# Altium PCB MZCAT_motherboard.PcbDoc (part 1 of 4)
Units mm, origin at the board's own origin, x right, y up, seen from the top; angles counter-clockwise.
Board outline 99.01 x 133.6 mm, 6 copper layers (Top Layer, Ref Top, Layer 2, Layer 3, Ref Bot, Bottom Layer), stack 1.473 mm thick; 289 components, 231 nets, 1176 pads, 492 vias.
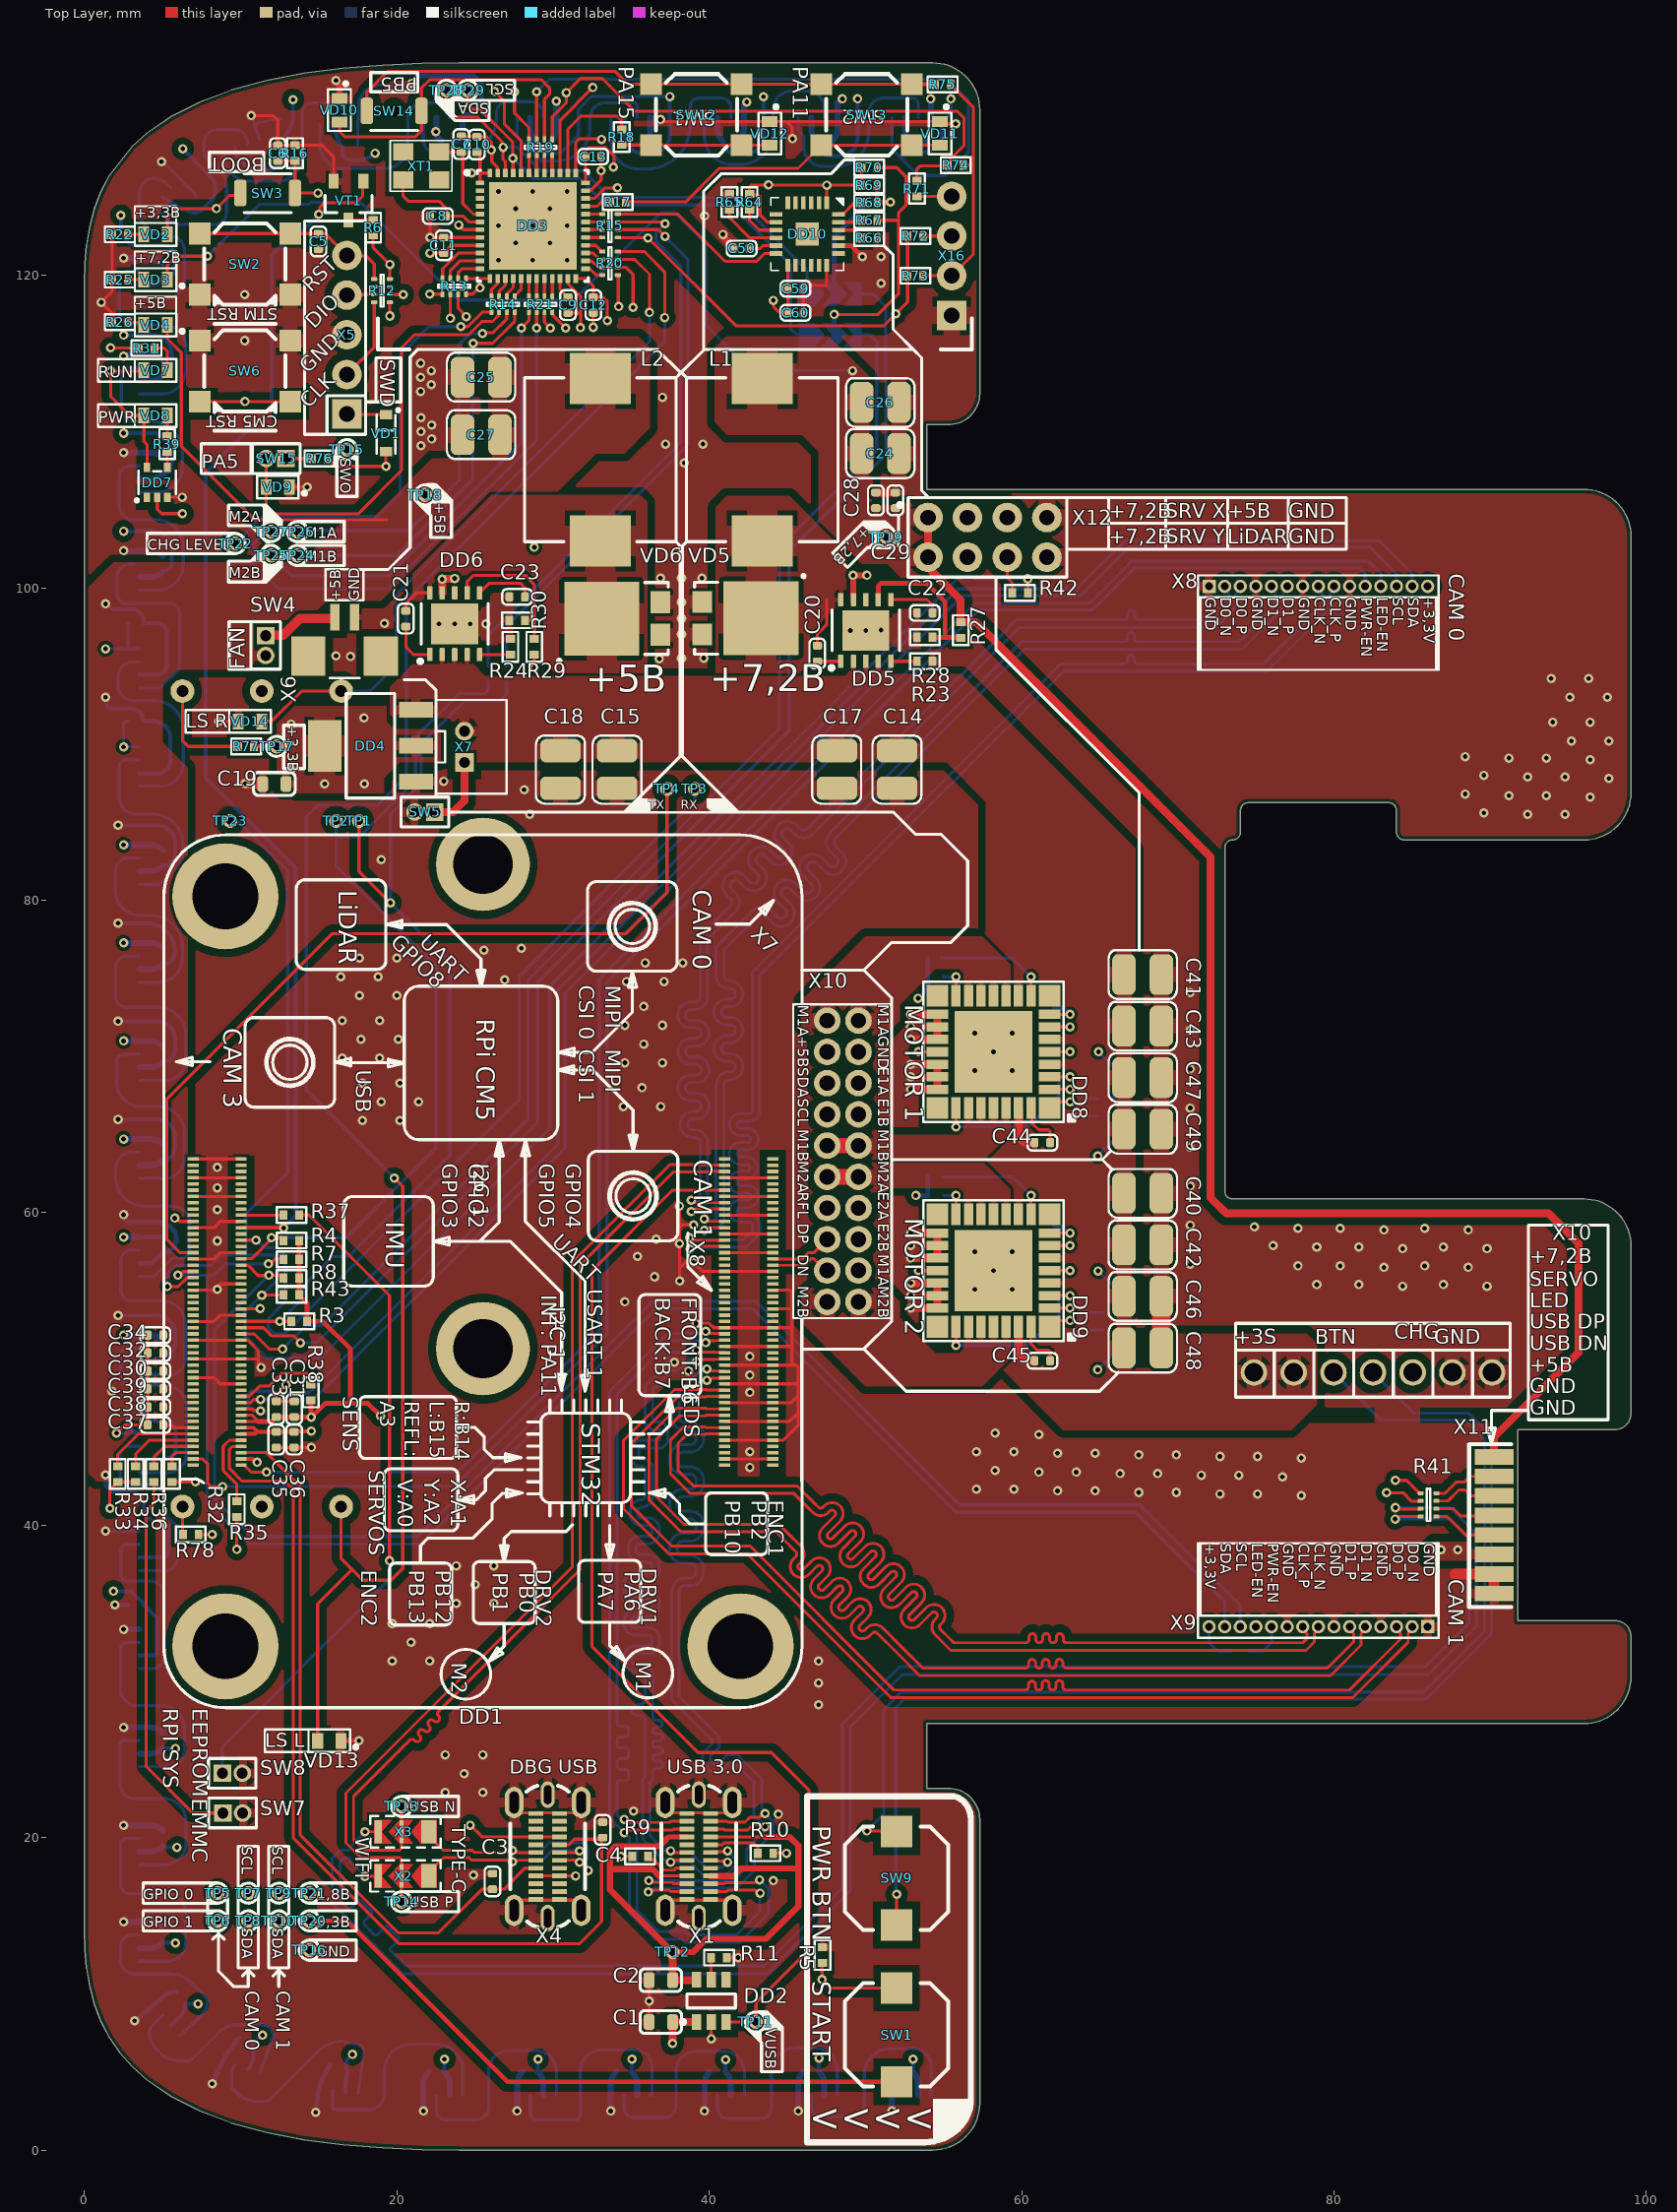
[diagram p0: Top Layer view]
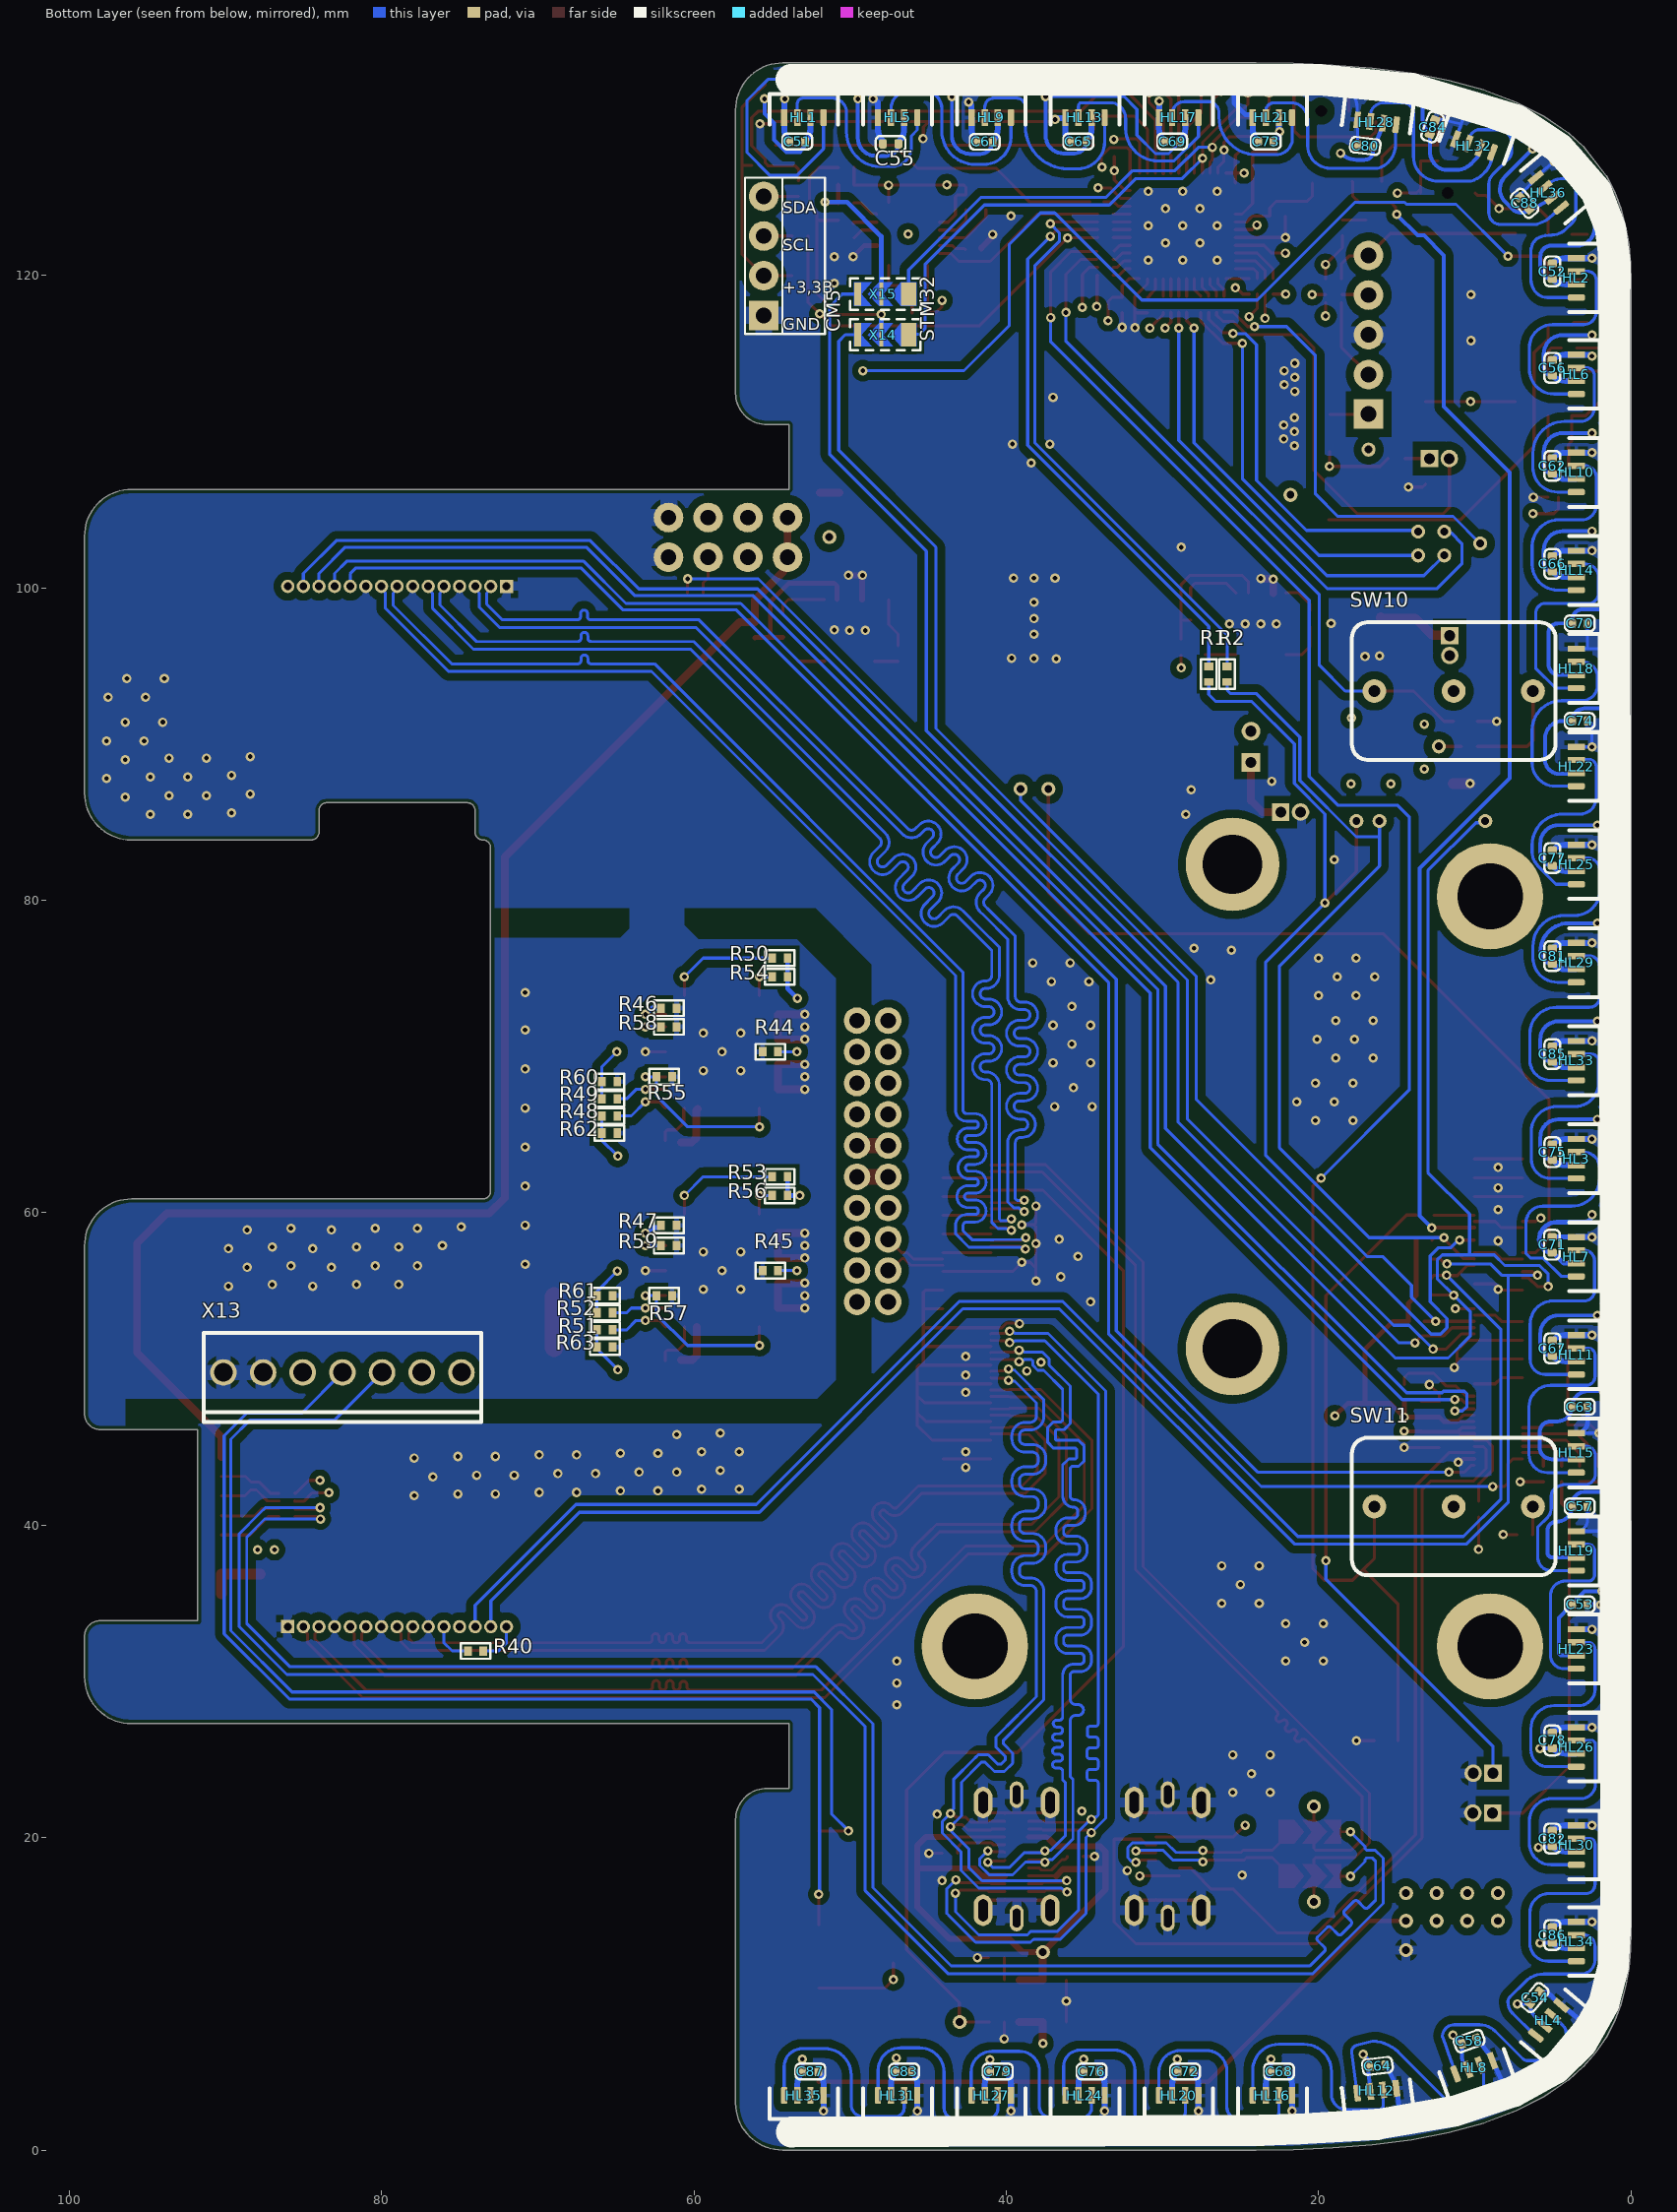
[diagram p1: Bottom Layer view, seen from below]
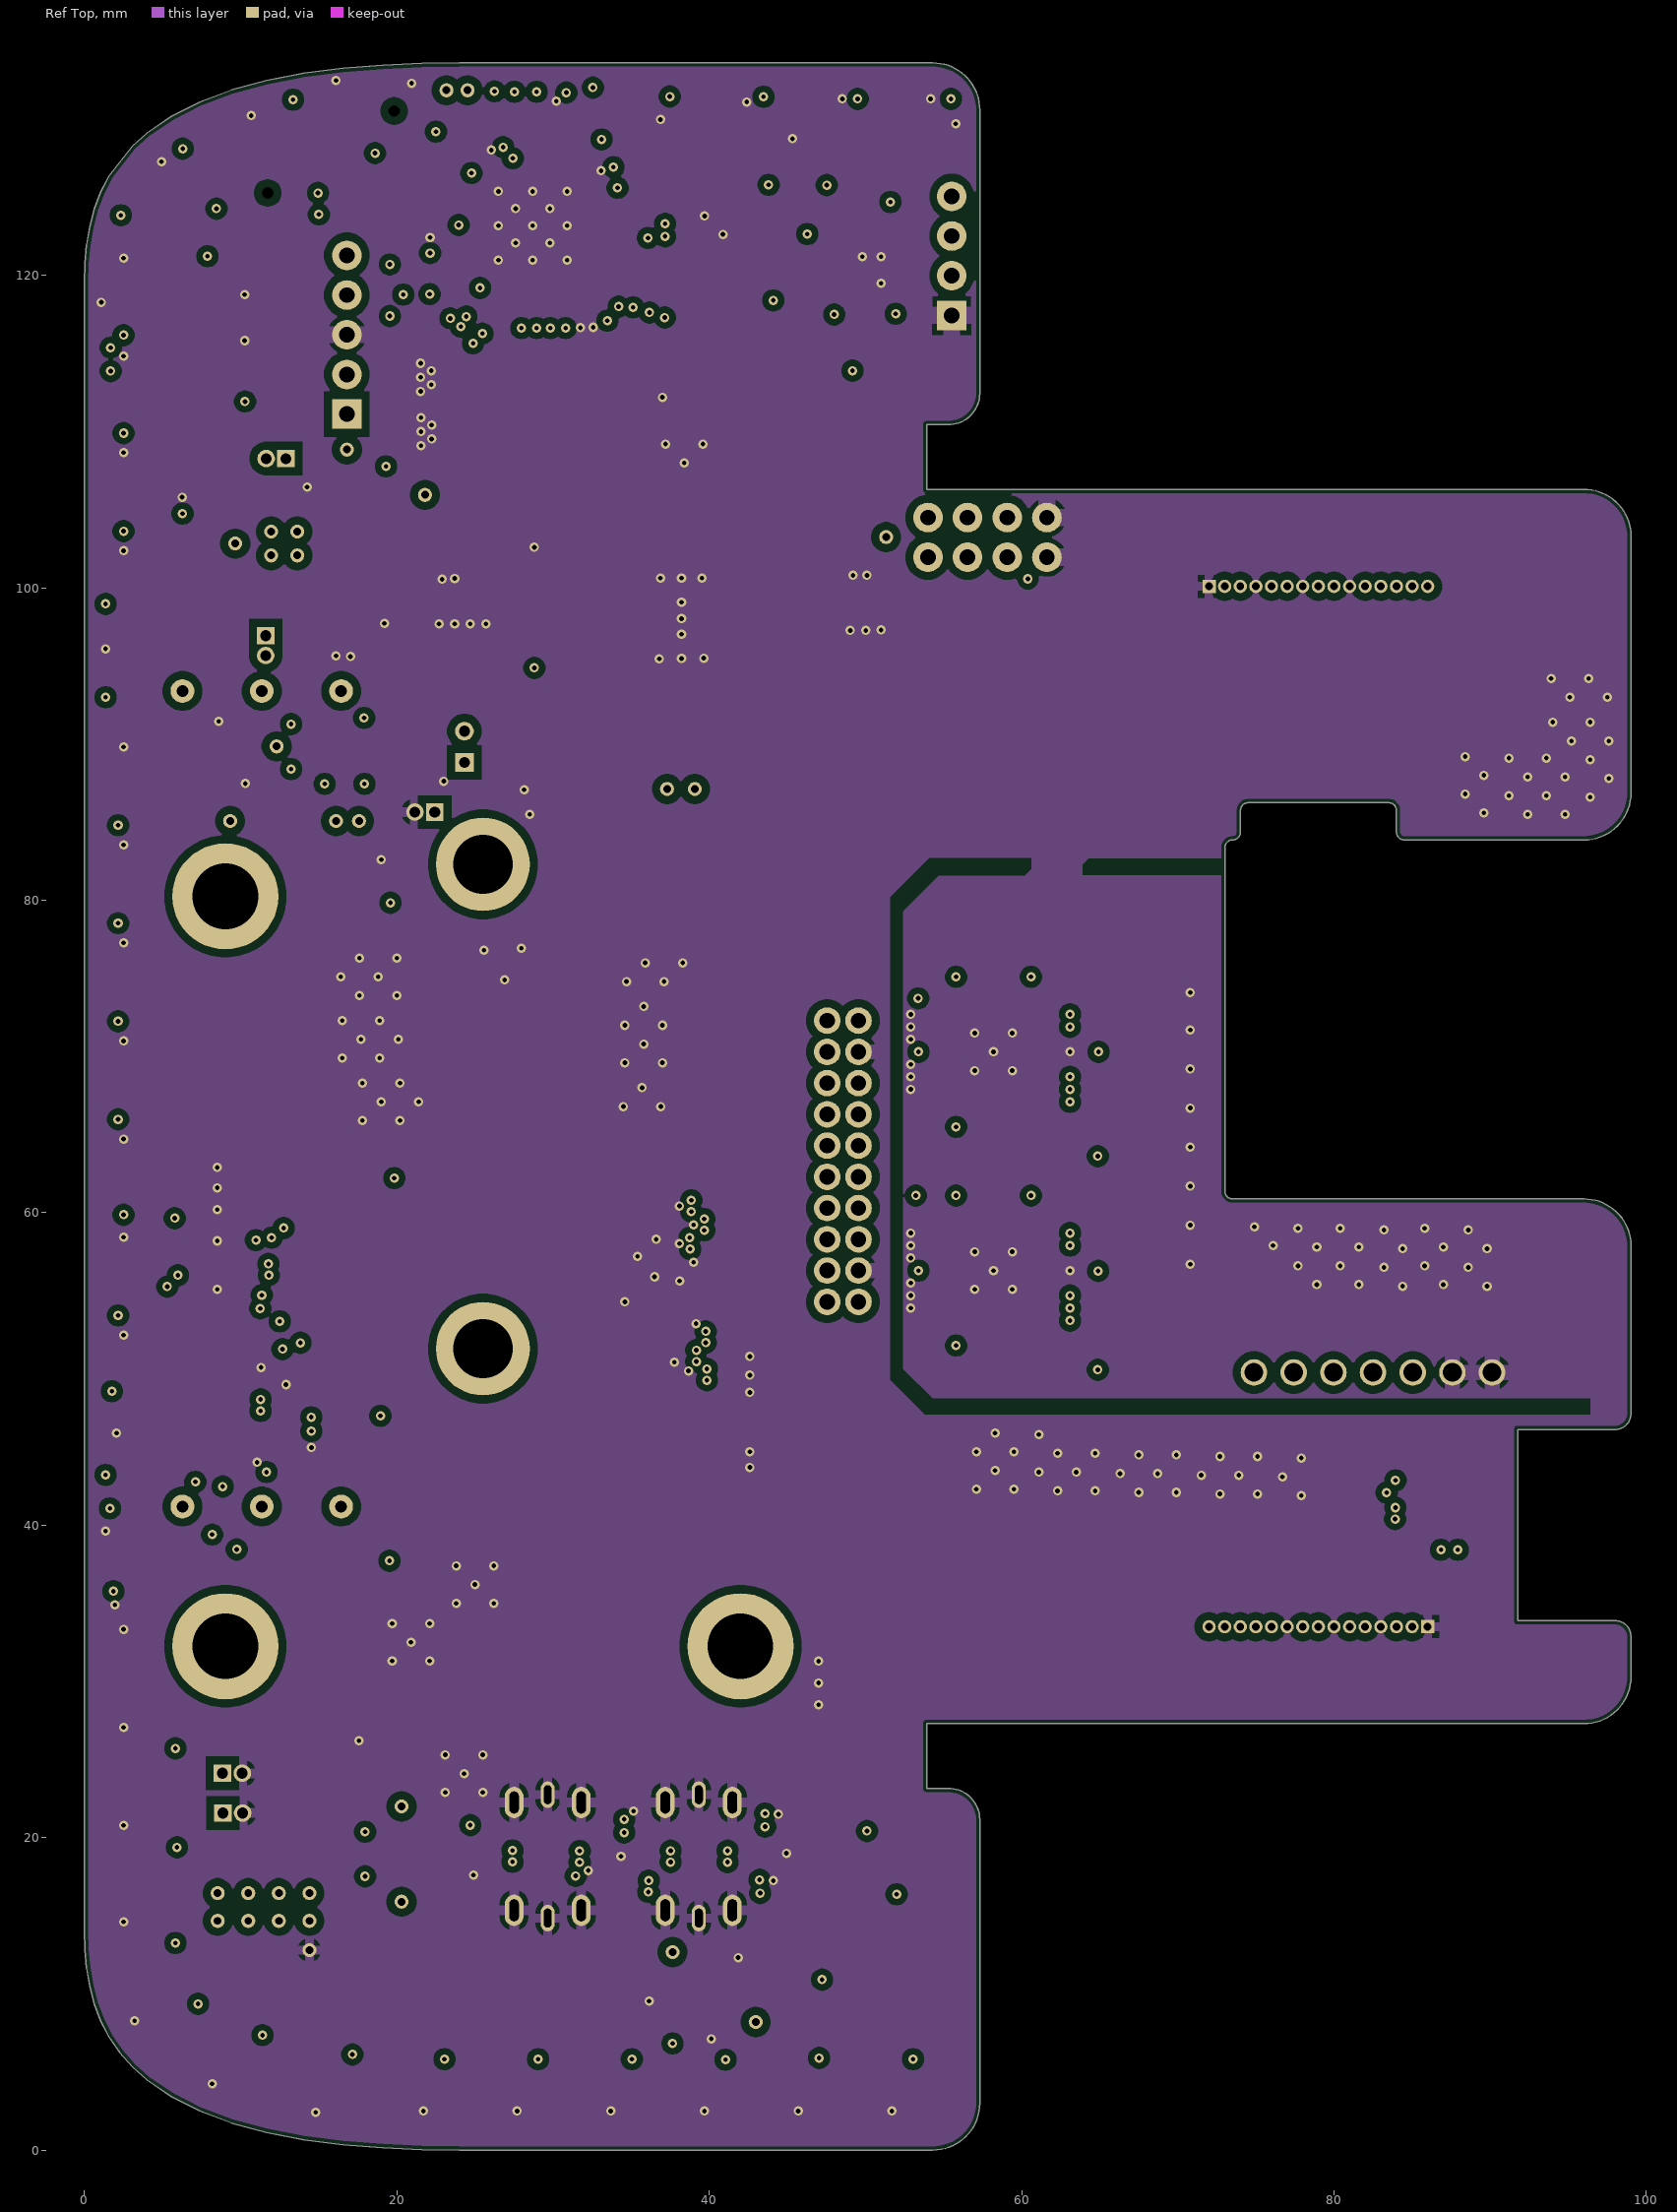
[diagram p2: Ref Top]
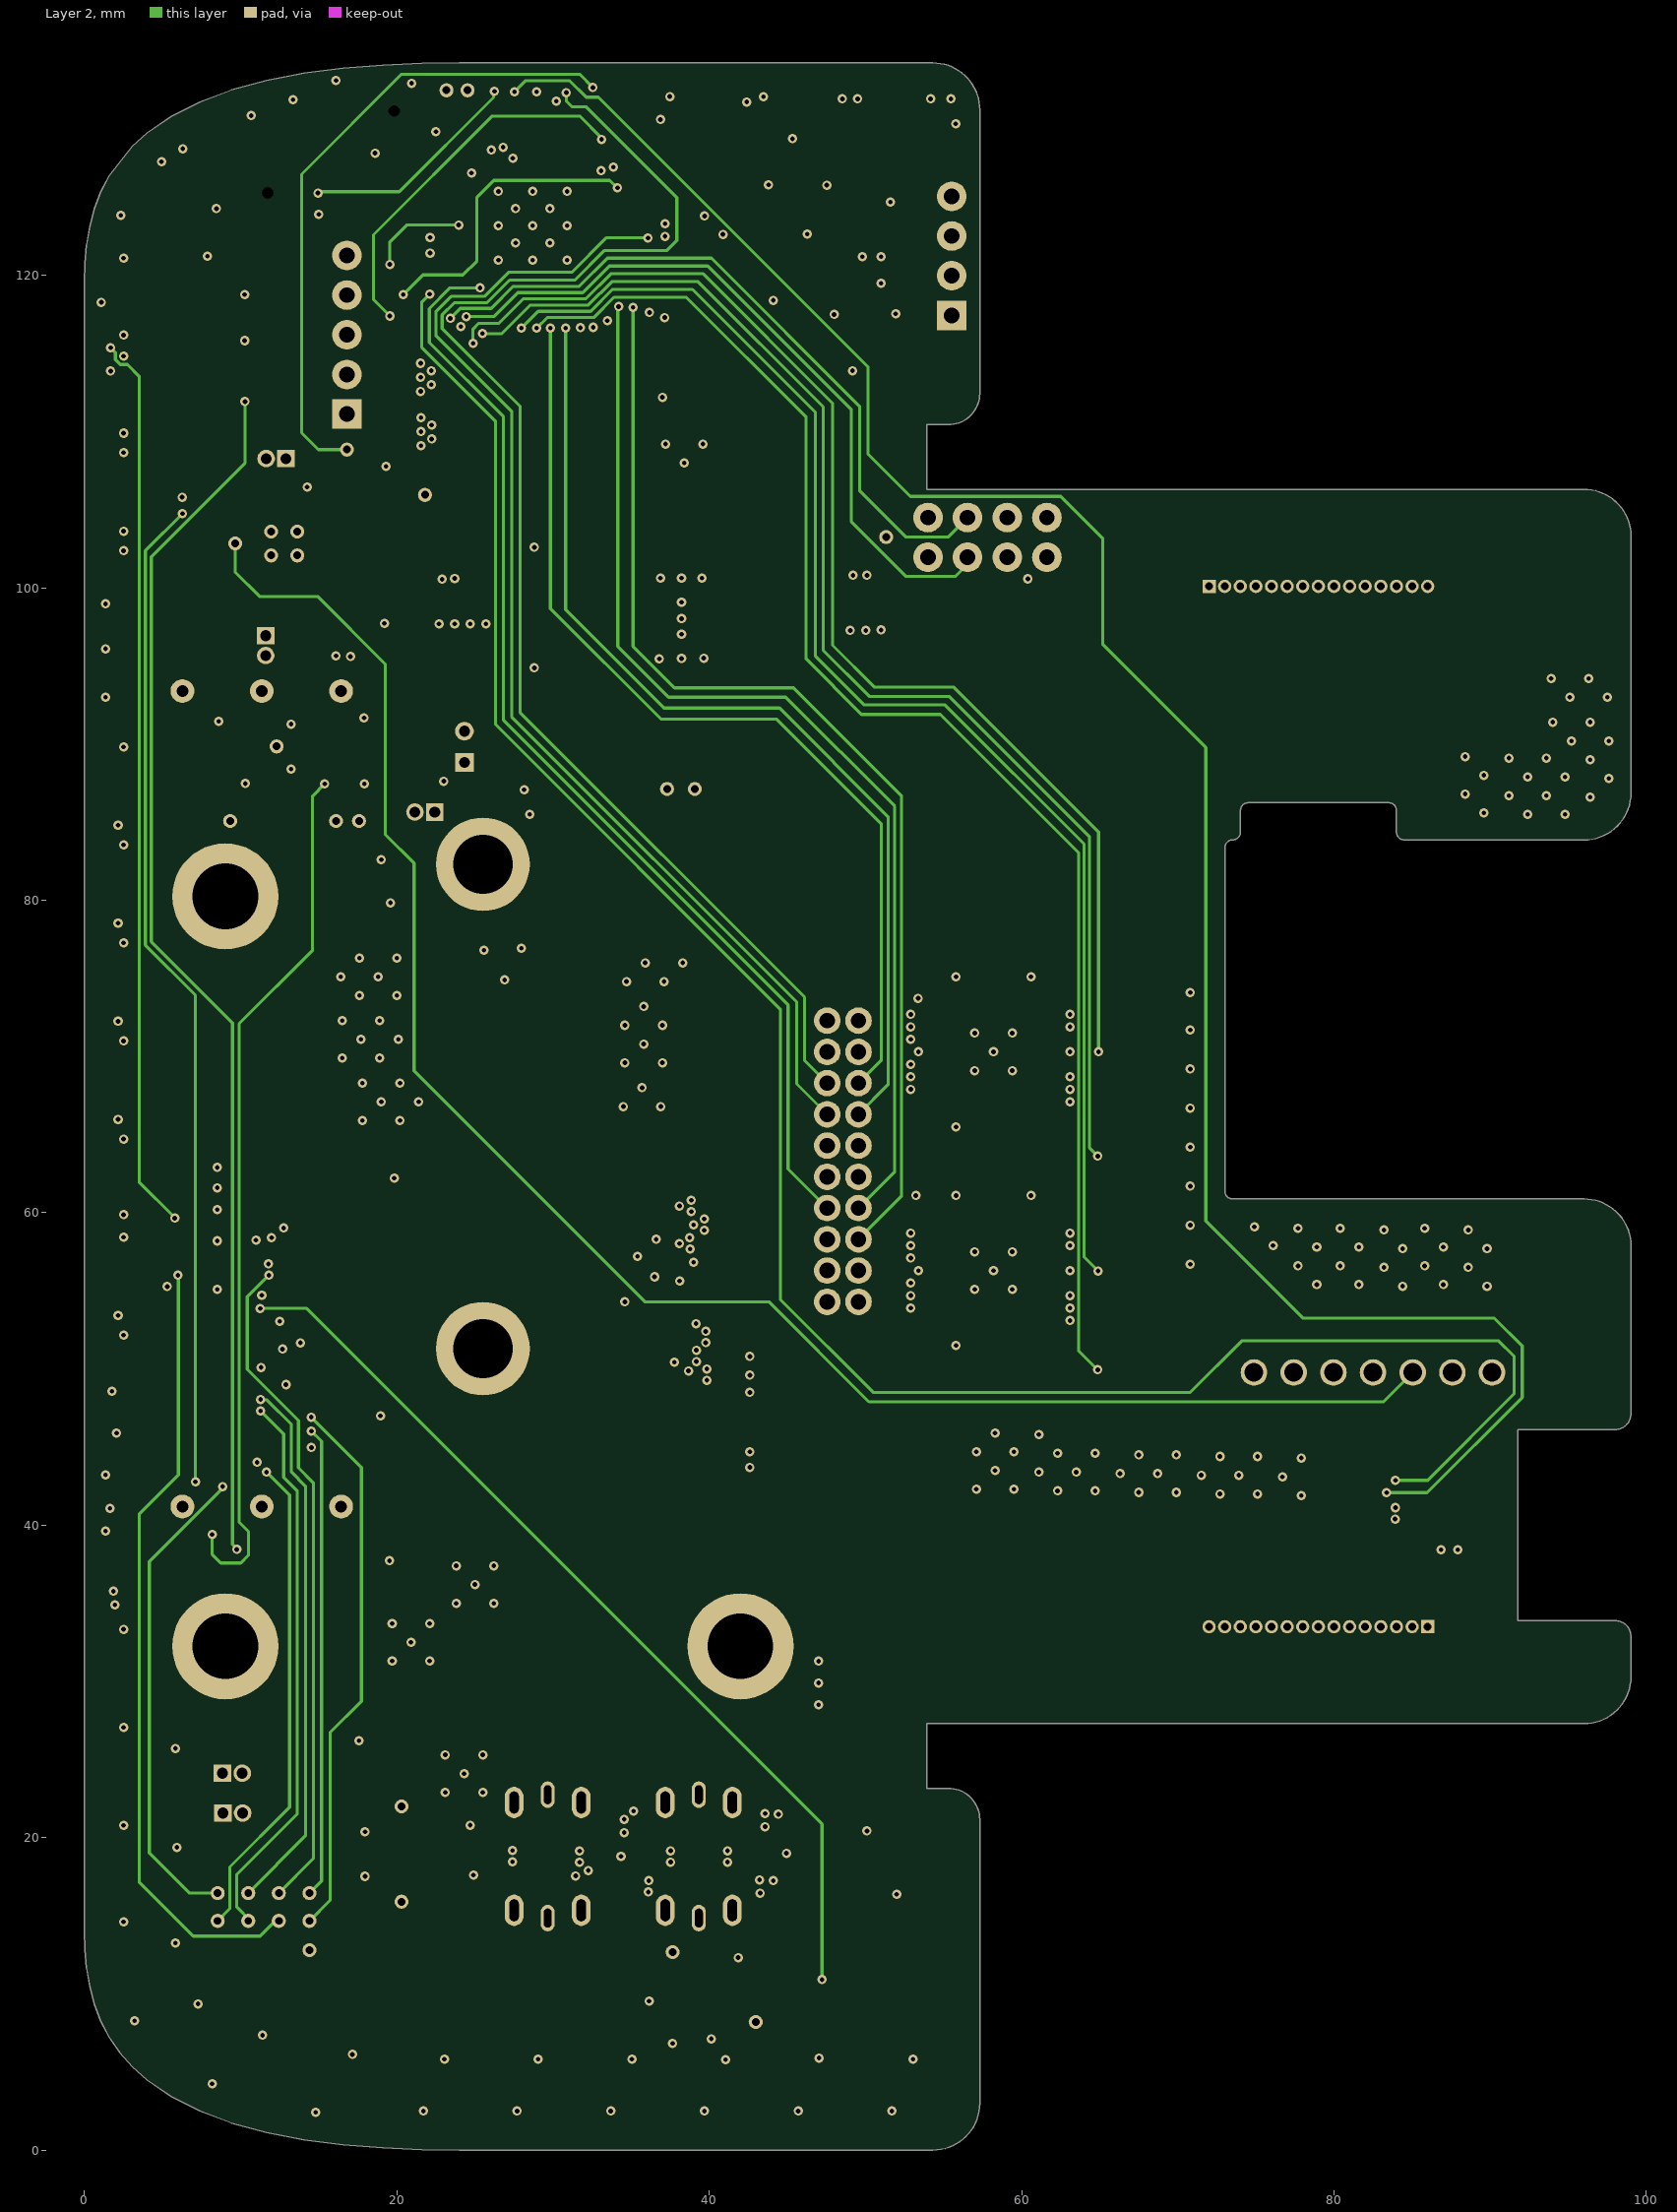
[diagram p3: Layer 2]
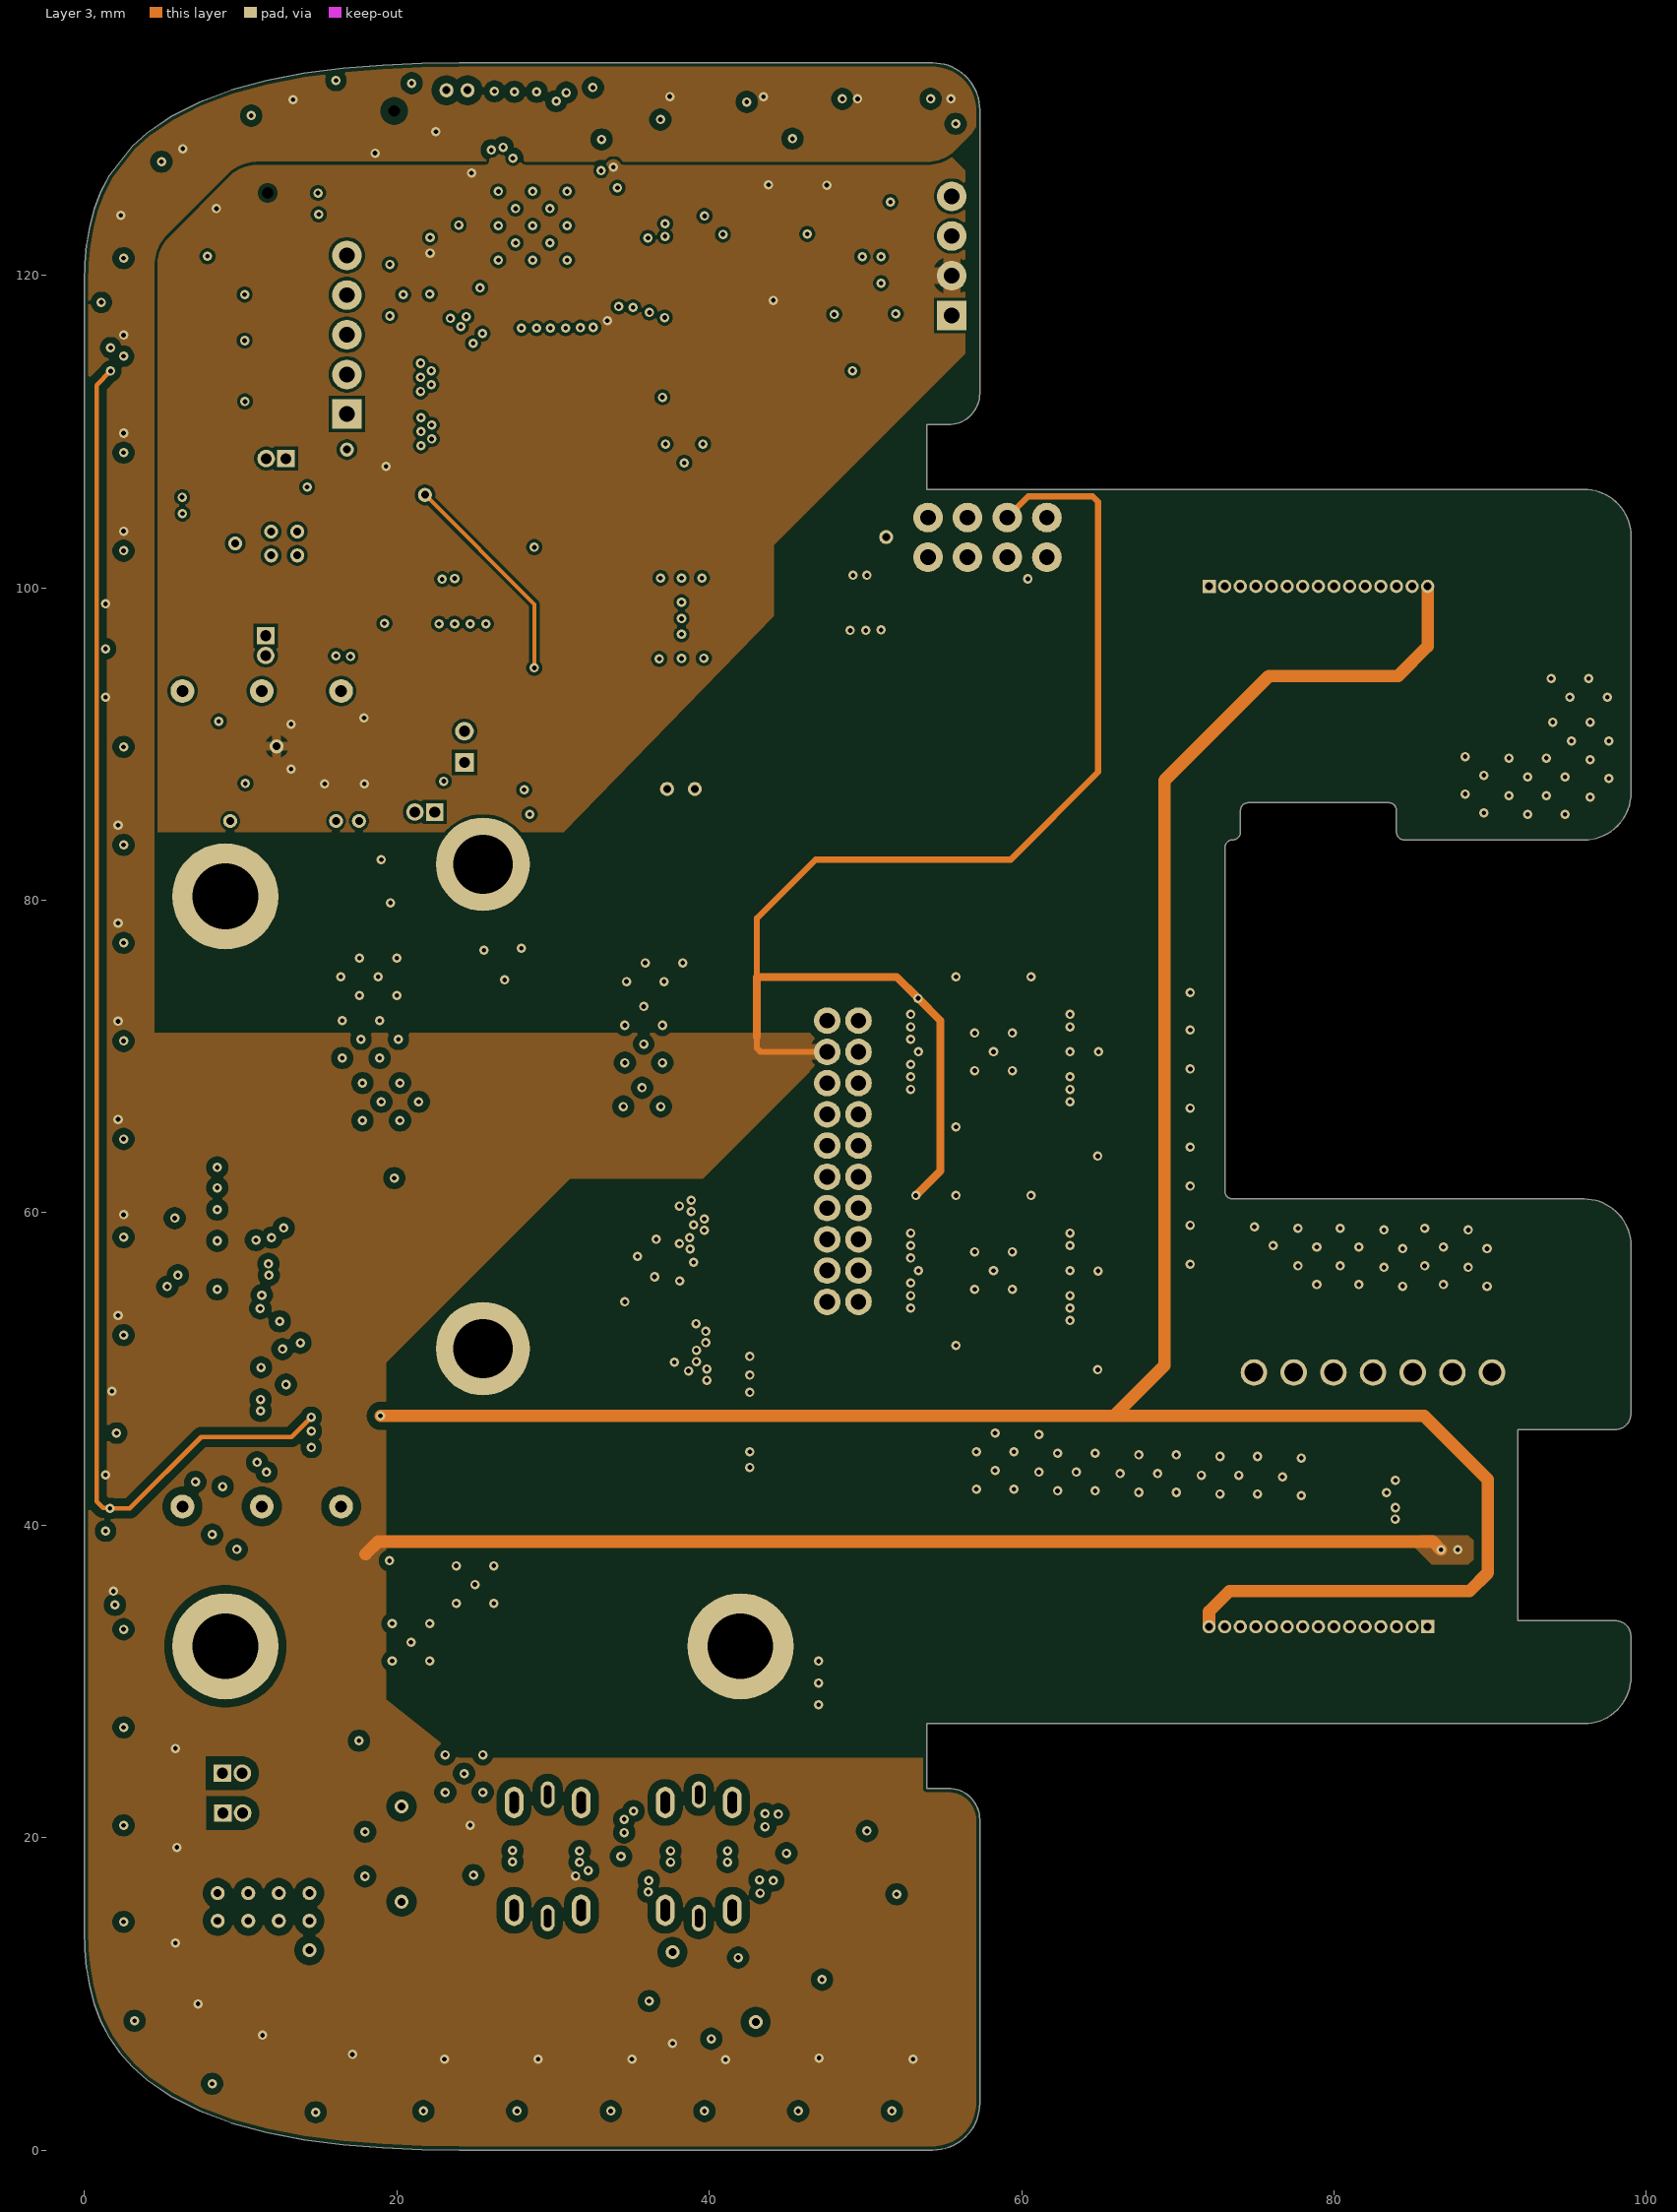
[diagram p4: Layer 3]
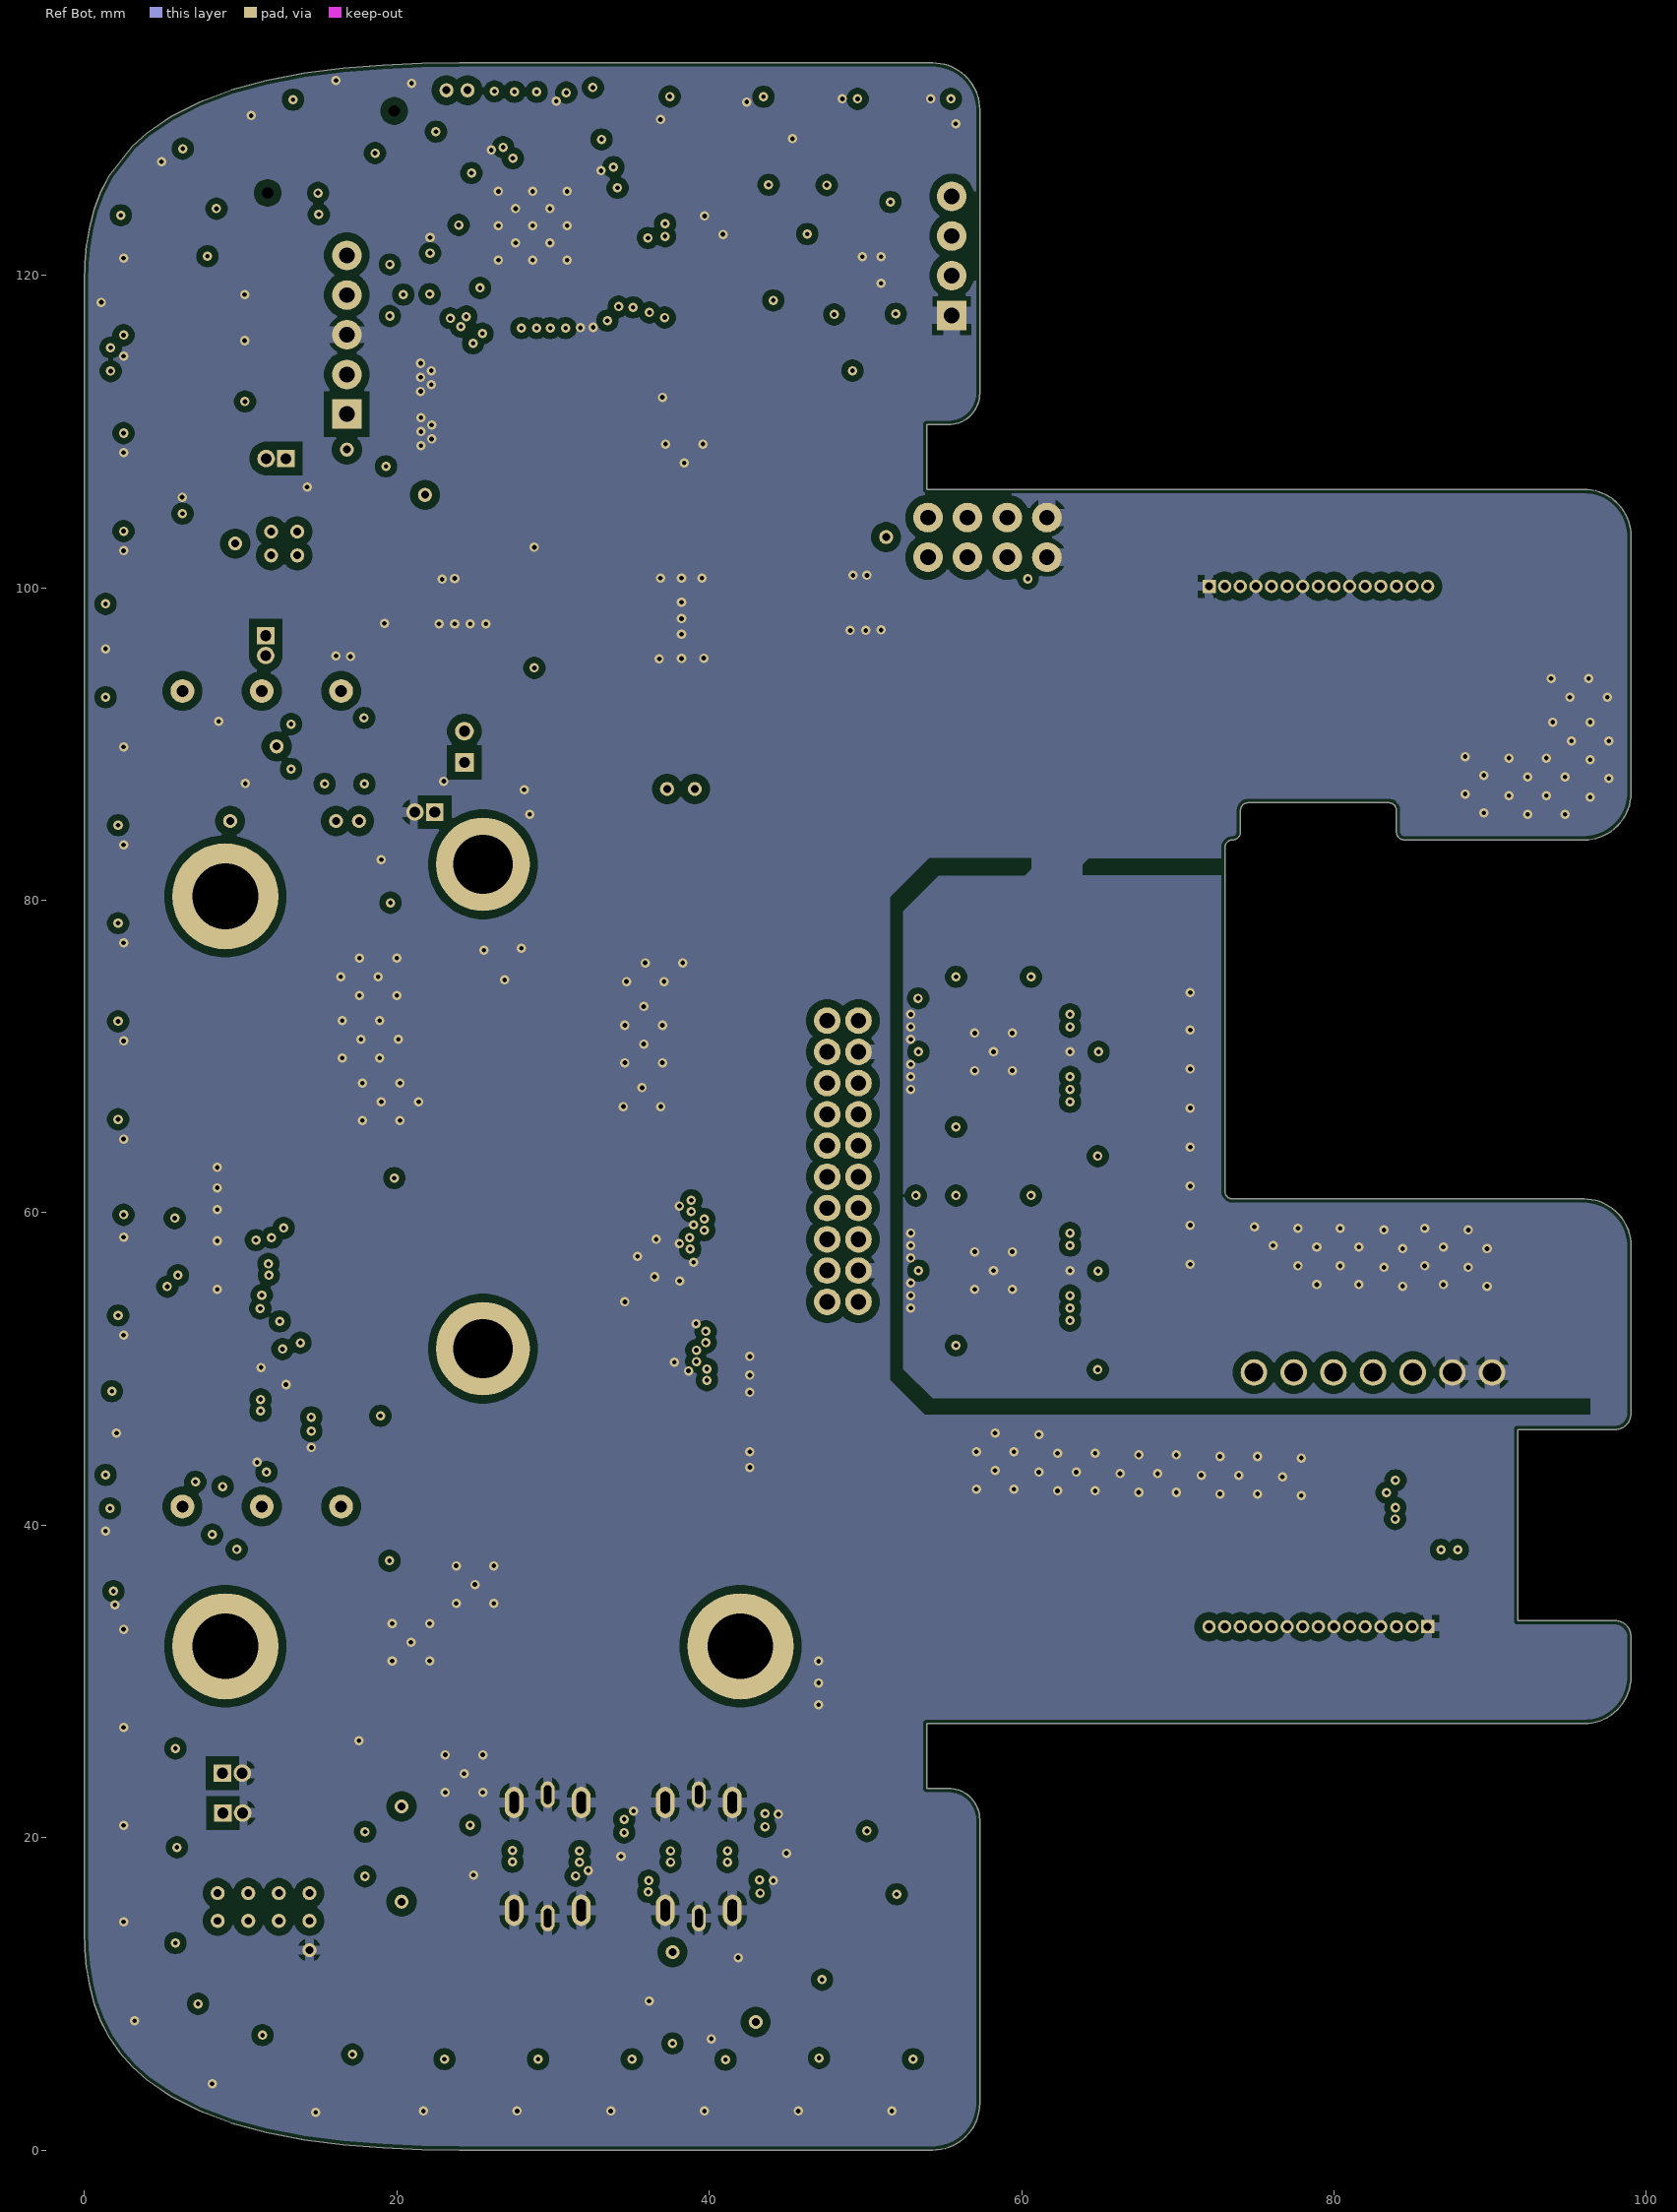
[diagram p5: Ref Bot]

## Layer stack, top to bottom
Top Solder: solder mask 0.0102, SM-001, Dk 4
Top Layer: signal copper 0.018
Dielectric 1: prepreg 0.115, FR4 PR, Dk 4.2
Ref Top: signal copper 0.018
Core 1: core 0.51, FR4 Tg150, Dk 4.6
Layer 2: signal copper 0.018
Dielectric 2: prepreg 0.115, FR4 PR, Dk 4.2
Layer 3: signal copper 0.018
Core 2: core 0.51, FR4 Tg150, Dk 4.6
Ref Bot: signal copper 0.018
Dielectric 3: prepreg 0.115, FR4 PR, Dk 4.2
Bottom Layer: signal copper 0.018
Board Layer Stack Bottom Solder: solder mask 0.0102, SM-001, Dk 4

## Board outline
2.252,6.252 1.581,7.233 1.58,7.233 1.041,8.272 1.041,8.273 0.626,9.362 0.626,9.363 0.328,10.493 0.328,10.494 0.134,11.657 0.134,11.658 0.03,12.843 0,14.037 0,119.565 0.03,120.759 0.03,120.76 0.134,121.944 0.134,121.945 0.328,123.108 0.328,123.109 0.626,124.24 1.041,125.329 1.041,125.33 1.58,126.369 1.581,126.37 3.058,128.267 3.059,128.268 4.002,129.116 4.003,129.116 5.558,130.184 5.559,130.185 7.369,131.101 9.412,131.863 9.413,131.863 11.655,132.472 11.656,132.472 14.055,132.935 16.558,133.262 19.102,133.468 21.612,133.573 24.006,133.603 54.316,133.603 cw(c54.316,130.596) 57.323,130.596 57.323,112.451 cw(c55.316,112.451) 55.316,110.444 53.918,110.444 53.918,106.308 96.006,106.308 cw(c96.006,103.301) 99.013,103.301 99.013,86.87 cw(c96.006,86.87) 96.006,83.863 84.506,83.863 cw(c84.506,84.37) 84,84.37 84,85.752 ccw(c83.506,85.752) 83.506,86.246 74.506,86.246 ccw(c74.506,85.752) 74.013,85.752 74.013,84.37 cw(c73.506,84.37) 73.506,83.863 ccw(c73.506,83.37) 73.013,83.37 73.013,61.379 ccw(c73.506,61.379) 73.506,60.886 96.006,60.886 cw(c96.006,57.879) 99.013,57.879 99.013,47.131 cw(c98.006,47.131) 98.006,46.125 91.763,46.125 91.763,33.888 98.006,33.888 cw(c98.006,32.881) 99.013,32.881 99.013,30.301 cw(c96.006,30.301) 96.006,27.294 53.918,27.294 53.918,23.158 55.317,23.158 cw(c55.316,21.151) 57.323,21.151 57.323,3.006 cw(c54.316,3.006) 54.316,0 24.006,0 21.613,0.029 19.102,0.134 16.558,0.341 14.055,0.667 11.656,1.13 11.655,1.13 9.413,1.739 9.412,1.739 7.369,2.501 5.559,3.417 5.558,3.418 4.003,4.486 4.002,4.487 3.059,5.334 3.058,5.335

## Design rules (kind name [scope] priority, off if disabled: settings)
AcuteAngle min_acute_angle [OnCopper] p1: minimum=3.50000000000000E+0001 checktracksonly=FALSE // Минимальный угол между примитивами топологии
BoardOutlineClearance board_outline_clearance_std [NOT (OnLayer('Bottom Overlay') OR OnLayer('Top Overlay'))] p1: gap=0.25 ignorepadtopadclearanceinfootprint=FALSE except(0: Arc-SplitContinuation Track-SplitContinuation SMDPad-SplitContinuation THPad-SplitContinuation Via-SplitContinuation Fill-SplitContinuation Poly-SplitContinuation Region-SplitContinuation Text-SplitContinuation) // Отступ элементов топологии от края фрезеруемой печатной платы
Clearance GND [InPolygonClass('GND')] p1: gap=0.5 ignorepadtopadclearanceinfootprint=FALSE except(0.4: Via-Fill Via-Poly Via-Region)
Clearance clearance_outer_18um_std [OnTopLayer OR OnBottomLayer] p2: gap=0.125 ignorepadtopadclearanceinfootprint=FALSE except(0.2: Arc-Fill Arc-Poly Track-Fill Track-Poly SMDPad-Fill SMDPad-Poly THPad-Fill THPad-Poly Via-Fill Via-Poly Fill-Fill Fill-Poly Poly-Poly Poly-Region Poly-Text; 0.25: Arc-Hole Track-Hole THPad-Hole Via-Hole Fill-Hole Poly-Hole Region-Hole Text-Hole) // Зазоры на внешних слоях
Clearance clearance_inner_18um_std [NOT (OnTopLayer Or OnBottomLayer)] p3: gap=0.125 ignorepadtopadclearanceinfootprint=FALSE except(0.2: Arc-Fill Arc-Poly Track-Fill Track-Poly SMDPad-SMDPad SMDPad-Fill SMDPad-Poly THPad-Fill THPad-Poly Via-Fill Via-Poly Fill-Fill Fill-Poly Poly-Poly Poly-Region Poly-Text; 0.25: Arc-Hole Track-Hole SMDPad-Hole THPad-Hole Via-Hole Fill-Hole Poly-Hole Region-Hole Text-Hole) // Зазоры на внутренних слоях
ComponentClearance [All] p1: gap=0 collisioncheckmode=3 verticalgap=0 showdistances=FALSE
DiffPairsRouting "Schematic Differential Pairs Routing_2" [InNetClass('CAM_0')] p1: maxlimit=0.3 minlimit=0.3 mostfreqgap=0.3 toplayer_minwidth=0.184 toplayer_maxwidth=0.184 toplayer_prefwidth=0.184 bottomlayer_minwidth=0.184 bottomlayer_maxwidth=0.184 bottomlayer_prefwidth=0.184 impedanceprofiledriven=TRUE impedanceprofileid={16D487F4-44CF-4EAF-93FF-71EBD454BA51} impedanceprofilevalue=100.000000 maxuncoupledlength=12.7
DiffPairsRouting "Schematic Differential Pairs Routing" [InNetClass('CAM_1')] p2: maxlimit=0.3 minlimit=0.3 mostfreqgap=0.3 toplayer_minwidth=0.184 toplayer_maxwidth=0.184 toplayer_prefwidth=0.184 bottomlayer_minwidth=0.184 bottomlayer_maxwidth=0.184 bottomlayer_prefwidth=0.184 impedanceprofiledriven=TRUE impedanceprofileid={16D487F4-44CF-4EAF-93FF-71EBD454BA51} impedanceprofilevalue=100.000000 maxuncoupledlength=12.7
DiffPairsRouting "Schematic Differential Pairs Routing_15" [InNetClass('TypeC')] p3: maxlimit=0.3 minlimit=0.3 mostfreqgap=0.3 toplayer_minwidth=0.184 toplayer_maxwidth=0.184 toplayer_prefwidth=0.184 bottomlayer_minwidth=0.184 bottomlayer_maxwidth=0.184 bottomlayer_prefwidth=0.184 impedanceprofiledriven=TRUE impedanceprofileid={16D487F4-44CF-4EAF-93FF-71EBD454BA51} impedanceprofilevalue=100.000000 maxuncoupledlength=12.7
DiffPairsRouting "Schematic Differential Pairs Routing_7" [InNet('USB2.0_D_2_P')] p4: maxlimit=0.3 minlimit=0.3 mostfreqgap=0.3 toplayer_minwidth=0.184 toplayer_maxwidth=0.184 toplayer_prefwidth=0.184 bottomlayer_minwidth=0.184 bottomlayer_maxwidth=0.184 bottomlayer_prefwidth=0.184 impedanceprofiledriven=TRUE impedanceprofileid={16D487F4-44CF-4EAF-93FF-71EBD454BA51} impedanceprofilevalue=100.000000 maxuncoupledlength=12.7
DiffPairsRouting "Schematic Differential Pairs Routing_1" [InNet('USB2.0_D_2_N')] p5: maxlimit=0.3 minlimit=0.3 mostfreqgap=0.3 toplayer_minwidth=0.184 toplayer_maxwidth=0.184 toplayer_prefwidth=0.184 bottomlayer_minwidth=0.184 bottomlayer_maxwidth=0.184 bottomlayer_prefwidth=0.184 impedanceprofiledriven=TRUE impedanceprofileid={16D487F4-44CF-4EAF-93FF-71EBD454BA51} impedanceprofilevalue=100.000000 maxuncoupledlength=12.7
DiffPairsRouting "Schematic Differential Pairs Routing_52" [InNetClass('USB_2.0')] p6: maxlimit=0.3 minlimit=0.3 mostfreqgap=0.3 toplayer_minwidth=0.184 toplayer_maxwidth=0.184 toplayer_prefwidth=0.184 bottomlayer_minwidth=0.184 bottomlayer_maxwidth=0.184 bottomlayer_prefwidth=0.184 impedanceprofiledriven=TRUE impedanceprofileid={16D487F4-44CF-4EAF-93FF-71EBD454BA51} impedanceprofilevalue=100.000000 maxuncoupledlength=12.7
DiffPairsRouting "Schematic Differential Pairs Routing_12" [InNetClass('USB_2.0_CAM')] p7: maxlimit=0.3 minlimit=0.3 mostfreqgap=0.3 toplayer_minwidth=0.184 toplayer_maxwidth=0.184 toplayer_prefwidth=0.184 bottomlayer_minwidth=0.184 bottomlayer_maxwidth=0.184 bottomlayer_prefwidth=0.184 impedanceprofiledriven=TRUE impedanceprofileid={16D487F4-44CF-4EAF-93FF-71EBD454BA51} impedanceprofilevalue=100.000000 maxuncoupledlength=12.7
DiffPairsRouting diff_pairs_routing [All] p8: maxlimit=0.254 minlimit=0.127 mostfreqgap=0.254 toplayer_maxgap=0.127 toplayer_prefgap=0.127 toplayer_minwidth=0.143 toplayer_maxwidth=0.143 toplayer_prefwidth=0.143 midlayer1_minwidth=0.381 midlayer1_maxwidth=0.381 midlayer1_prefwidth=0.381 midlayer2_minwidth=0.381 midlayer2_maxwidth=0.381 midlayer2_prefwidth=0.381 midlayer3_minwidth=0.381 midlayer3_maxwidth=0.381 midlayer3_prefwidth=0.381 midlayer4_minwidth=0.381 midlayer4_maxwidth=0.381 midlayer4_prefwidth=0.381 bottomlayer_maxgap=0.127 bottomlayer_prefgap=0.127 bottomlayer_minwidth=0.143 bottomlayer_maxwidth=0.143 bottomlayer_prefwidth=0.143 impedanceprofiledriven=TRUE maxuncoupledlength=12.7 // Правила трассировки дифференциальных пар
HoleSize min_hole_size_std [IsPad] p1: absolutevalues=TRUE maxlimit=5.9 minlimit=0.5 maxpercent=80.000 minpercent=20.000 // Диаметр межслойного переходного отверстия
HoleSize min_hole_size_via_std [IsVia] p2: absolutevalues=TRUE maxlimit=5.9 minlimit=0.3 maxpercent=80.000 minpercent=20.000 // Минимальный диаметр монтажного отверстия
HoleToHoleClearance hole_to_hole_clearance_std [All] p1: gap=0.2 allowstackedmicrovias=FALSE // Минимальное расстояние между краями двух отверстий
MatchedLengths "Schematic Matched Net Lengths_5" [InNetClass('CAM_1')] p1: tolerance=1.5 checknetsindiffpair=FALSE checkdiffpairvsdiffpair=TRUE checkxsignals=TRUE checkothers=TRUE
MatchedLengths "Schematic Matched Net Lengths_4" [InNetClass('CAM_0')] p2: tolerance=1.5 checknetsindiffpair=FALSE checkdiffpairvsdiffpair=TRUE checkxsignals=TRUE checkothers=TRUE
MatchedLengths "Schematic Matched Net Lengths_3" [InNetClass('CAM_1')] p3: tolerance=0.15 checknetsindiffpair=TRUE checkdiffpairvsdiffpair=FALSE checkxsignals=FALSE checkothers=FALSE
MatchedLengths "Schematic Matched Net Lengths" [InNetClass('CAM_0')] p4: tolerance=0.15 checknetsindiffpair=TRUE checkdiffpairvsdiffpair=FALSE checkxsignals=FALSE checkothers=FALSE
MatchedLengths "Schematic Matched Net Lengths_27" [InNet('USB2.0_D_2_P')] p5: tolerance=1.5 checknetsindiffpair=FALSE checkdiffpairvsdiffpair=TRUE checkxsignals=TRUE checkothers=TRUE
MatchedLengths "Schematic Matched Net Lengths_26" [InNetClass('TypeC')] p6: tolerance=1.5 checknetsindiffpair=FALSE checkdiffpairvsdiffpair=TRUE checkxsignals=TRUE checkothers=TRUE
MatchedLengths "Schematic Matched Net Lengths_17" [InNet('USB2.0_D_2_N')] p7: tolerance=1.5 checknetsindiffpair=FALSE checkdiffpairvsdiffpair=TRUE checkxsignals=TRUE checkothers=TRUE
MatchedLengths "Schematic Matched Net Lengths_13" [InNetClass('TypeC')] p8: tolerance=0.15 checknetsindiffpair=TRUE checkdiffpairvsdiffpair=FALSE checkxsignals=FALSE checkothers=FALSE
MatchedLengths "Schematic Matched Net Lengths_11" [InNet('USB2.0_D_2_P')] p9: tolerance=0.15 checknetsindiffpair=TRUE checkdiffpairvsdiffpair=FALSE checkxsignals=FALSE checkothers=FALSE
MatchedLengths "Schematic Matched Net Lengths_1" [InNet('USB2.0_D_2_N')] p10: tolerance=0.15 checknetsindiffpair=TRUE checkdiffpairvsdiffpair=FALSE checkxsignals=FALSE checkothers=FALSE
MatchedLengths "Schematic Matched Net Lengths_115" [InNetClass('USB_2.0_CAM')] p11: tolerance=1.5 checknetsindiffpair=FALSE checkdiffpairvsdiffpair=TRUE checkxsignals=TRUE checkothers=TRUE
MatchedLengths "Schematic Matched Net Lengths_56" [InNetClass('USB_2.0')] p12: tolerance=1.5 checknetsindiffpair=FALSE checkdiffpairvsdiffpair=TRUE checkxsignals=TRUE checkothers=TRUE
MatchedLengths "Schematic Matched Net Lengths_22" [InNetClass('USB_2.0')] p13: tolerance=0.15 checknetsindiffpair=TRUE checkdiffpairvsdiffpair=FALSE checkxsignals=FALSE checkothers=FALSE
MatchedLengths "Schematic Matched Net Lengths_21" [InNetClass('USB_2.0_CAM')] p14: tolerance=0.15 checknetsindiffpair=TRUE checkdiffpairvsdiffpair=FALSE checkxsignals=FALSE checkothers=FALSE
MinimumAnnularRing min_via_ar_std [All] p1: minimumring=0.15 // Поясок площадки переходного отверстия (Annular ring VIA)
MinimumAnnularRing min_pad_ar_std [All] p2: minimumring=0.2 // Поясок монтажной контактной площадки (Annular ring PAD)
MinimumSolderMaskSliver min_solder_mask_bridge_std [All] p1: minsoldermaskwidth=0 // Мнимальная ширина масочного мостика
PlaneClearance plane_clearance_18um_std [All] p1: clearance=0.2 // Отступ полигона (для слоя plane) от элементов топологии
PlaneConnect [All] p1: planeconnectstyle=Relief reliefexpansion=0.5 reliefentries=4 reliefconductorwidth=0.2 reliefairgap=0.2
PolygonConnect poly_connect_to_pad<=0.3 [(AsMM(PadXSize_AllLayers)<=0.301) or (AsMM(PadYSize_AllLayers)<=0.301)] p1: thpad.connectstyle=Relief thpad.reliefconductorwidth=0.2 thpad.reliefentries=4 thpad.polygonreliefangle="90 Angle" thpad.airgapwidth=0.2 smdpad.connectstyle=Relief smdpad.reliefconductorwidth=0.2 smdpad.reliefentries=4 smdpad.polygonreliefangle="90 Angle" smdpad.airgapwidth=0.2 via.connectstyle=Direct via.reliefconductorwidth=0.254 via.reliefentries=4 via.polygonreliefangle="90 Angle" via.airgapwidth=0.254 // Правила подключения полигонов для падов от 0,3мм и меньше
PolygonConnect poly_connect_to_pad<=0.4 [(AsMM(PadXSize_AllLayers)<=0.401) or (AsMM(PadYSize_AllLayers)<=0.401)] p2: thpad.connectstyle=Relief thpad.reliefconductorwidth=0.26 thpad.reliefentries=4 thpad.polygonreliefangle="90 Angle" thpad.airgapwidth=0.2 smdpad.connectstyle=Relief smdpad.reliefconductorwidth=0.26 smdpad.reliefentries=4 smdpad.polygonreliefangle="90 Angle" smdpad.airgapwidth=0.2 via.connectstyle=Direct via.reliefconductorwidth=0.254 via.reliefentries=4 via.polygonreliefangle="90 Angle" via.airgapwidth=0.254 // Правила подключения полигонов для падов от 0,4 и меньше
PolygonConnect poly_connect_to_pad<=0.6 [(AsMM(PadXSize_AllLayers)<=0.601) or (AsMM(PadYSize_AllLayers)<=0.601)] p3: thpad.connectstyle=Relief thpad.reliefconductorwidth=0.33 thpad.reliefentries=4 thpad.polygonreliefangle="90 Angle" thpad.airgapwidth=0.2 smdpad.connectstyle=Relief smdpad.reliefconductorwidth=0.33 smdpad.reliefentries=4 smdpad.polygonreliefangle="90 Angle" smdpad.airgapwidth=0.2 via.connectstyle=Direct via.reliefconductorwidth=0.254 via.reliefentries=4 via.polygonreliefangle="90 Angle" via.airgapwidth=0.254 // Правила подключения полигонов для падов от 0,6мм и меньше
PolygonConnect poly_connect_to_pad<=0.7 [(AsMM(PadXSize_AllLayers)<=0.701) or (AsMM(PadYSize_AllLayers)<=0.701)] p4: thpad.connectstyle=Relief thpad.reliefconductorwidth=0.46 thpad.reliefentries=4 thpad.polygonreliefangle="90 Angle" thpad.airgapwidth=0.2 smdpad.connectstyle=Relief smdpad.reliefconductorwidth=0.46 smdpad.reliefentries=4 smdpad.polygonreliefangle="90 Angle" smdpad.airgapwidth=0.2 via.connectstyle=Direct via.reliefconductorwidth=0.254 via.reliefentries=4 via.polygonreliefangle="90 Angle" via.airgapwidth=0.254 // Правила подключения полигонов для падов от 0,7мм и меньше
PolygonConnect poly_connect_to_pad<=0.8 [(AsMM(PadXSize_AllLayers)<=0.8)or(AsMM(PadYSize_AllLayers)<=0.8)] p5: thpad.connectstyle=Relief thpad.reliefconductorwidth=0.53 thpad.reliefentries=4 thpad.polygonreliefangle="90 Angle" thpad.airgapwidth=0.3 smdpad.connectstyle=Relief smdpad.reliefconductorwidth=0.53 smdpad.reliefentries=4 smdpad.polygonreliefangle="90 Angle" smdpad.airgapwidth=0.2 via.connectstyle=Direct via.reliefconductorwidth=0.254 via.reliefentries=4 via.polygonreliefangle="90 Angle" via.airgapwidth=0.254 // Правила подключения полигонов для падов от 0,8мм и меньше
PolygonConnect poly_connect_to_pad<=1 [(AsMM(PadXSize_AllLayers)<=1.01)or(AsMM(PadYSize_AllLayers)<=1.01)] p6: thpad.connectstyle=Relief thpad.reliefconductorwidth=0.6 thpad.reliefentries=4 thpad.polygonreliefangle="90 Angle" thpad.airgapwidth=0.3 smdpad.connectstyle=Relief smdpad.reliefconductorwidth=0.6 smdpad.reliefentries=4 smdpad.polygonreliefangle="90 Angle" smdpad.airgapwidth=0.2 via.connectstyle=Direct via.reliefconductorwidth=0.254 via.reliefentries=4 via.polygonreliefangle="90 Angle" via.airgapwidth=0.254 // Правила подключения полигонов для падов от 1мм и меньше
PolygonConnect poly_connect_to_pad<=1.3 [(AsMM(PadXSize_AllLayers)<=1.31)or(AsMM(PadYSize_AllLayers)<=1.31)] p7: thpad.connectstyle=Relief thpad.reliefconductorwidth=0.66 thpad.reliefentries=4 thpad.polygonreliefangle="90 Angle" thpad.airgapwidth=0.3 smdpad.connectstyle=Relief smdpad.reliefconductorwidth=0.86 smdpad.reliefentries=4 smdpad.polygonreliefangle="90 Angle" smdpad.airgapwidth=0.2 via.connectstyle=Direct via.reliefconductorwidth=0.254 via.reliefentries=4 via.polygonreliefangle="90 Angle" via.airgapwidth=0.254 // Правила подключения полигонов для падов от 1,3мм и меньше
PolygonConnect poly_connect_to_pad<=1.6 [(AsMM(PadXSize_AllLayers)<=1.61)or(AsMM(PadYSize_AllLayers)<=1.61)] p8: thpad.connectstyle=Relief thpad.reliefconductorwidth=0.8 thpad.reliefentries=4 thpad.polygonreliefangle="90 Angle" thpad.airgapwidth=0.3 smdpad.connectstyle=Relief smdpad.reliefconductorwidth=1 smdpad.reliefentries=4 smdpad.polygonreliefangle="90 Angle" smdpad.airgapwidth=0.2 via.connectstyle=Direct via.reliefconductorwidth=0.254 via.reliefentries=4 via.polygonreliefangle="90 Angle" via.airgapwidth=0.254 // Правила подключения полигонов для падов от 1,6мм и меньше
PolygonConnect poly_connect_to_pad<=1.8 [(AsMM(PadXSize_AllLayers)<=1.8)or(AsMM(PadYSize_AllLayers)<=1.8)] p9: thpad.connectstyle=Relief thpad.reliefconductorwidth=1 thpad.reliefentries=4 thpad.polygonreliefangle="90 Angle" thpad.airgapwidth=0.3 smdpad.connectstyle=Relief smdpad.reliefconductorwidth=1.2 smdpad.reliefentries=4 smdpad.polygonreliefangle="90 Angle" smdpad.airgapwidth=0.2 via.connectstyle=Direct via.reliefconductorwidth=0.254 via.reliefentries=4 via.polygonreliefangle="90 Angle" via.airgapwidth=0.254 // Правила подключения полигонов для падов от 1,8мм и меньше
PolygonConnect poly_connect_to_pad<=2 [(AsMM(PadXSize_AllLayers)<=2.01)or(AsMM(PadYSize_AllLayers)<=2.01)] p10: thpad.connectstyle=Relief thpad.reliefconductorwidth=1.1 thpad.reliefentries=4 thpad.polygonreliefangle="90 Angle" thpad.airgapwidth=0.3 smdpad.connectstyle=Relief smdpad.reliefconductorwidth=1.4 smdpad.reliefentries=4 smdpad.polygonreliefangle="90 Angle" smdpad.airgapwidth=0.2 via.connectstyle=Direct via.reliefconductorwidth=0.254 via.reliefentries=4 via.polygonreliefangle="90 Angle" via.airgapwidth=0.254 // Правила подключения полигонов для падов от 2мм и меньше
PolygonConnect poly_connect_to_pad<=2.3 [(AsMM(PadXSize_AllLayers)<=2.31)or(AsMM(PadYSize_AllLayers)<=2.31)] p11: thpad.connectstyle=Relief thpad.reliefconductorwidth=1.2 thpad.reliefentries=4 thpad.polygonreliefangle="90 Angle" thpad.airgapwidth=0.3 smdpad.connectstyle=Relief smdpad.reliefconductorwidth=1.4 smdpad.reliefentries=4 smdpad.polygonreliefangle="90 Angle" smdpad.airgapwidth=0.2 via.connectstyle=Direct via.reliefconductorwidth=0.254 via.reliefentries=4 via.polygonreliefangle="90 Angle" via.airgapwidth=0.254 // Правила подключения полигонов для падов от 2,3мм и меньше
PolygonConnect poly_connect_to_pad<=2.5 [(AsMM(PadXSize_AllLayers)<=2.51)or(AsMM(PadYSize_AllLayers)<=2.51)] p12: thpad.connectstyle=Relief thpad.reliefconductorwidth=1.2 thpad.reliefentries=4 thpad.polygonreliefangle="90 Angle" thpad.airgapwidth=0.3 smdpad.connectstyle=Relief smdpad.reliefconductorwidth=1.4 smdpad.reliefentries=4 smdpad.polygonreliefangle="90 Angle" smdpad.airgapwidth=0.2 via.connectstyle=Direct via.reliefconductorwidth=0.254 via.reliefentries=4 via.polygonreliefangle="90 Angle" via.airgapwidth=0.254 // Правила подключения полигонов для падов от 2,5мм и меньше
PolygonConnect poly_connect_to_pad<=2.7 [(AsMM(PadXSize_AllLayers)<=2.71)or(AsMM(PadYSize_AllLayers)<=2.71)] p13: thpad.connectstyle=Relief thpad.reliefconductorwidth=1.4 thpad.reliefentries=4 thpad.polygonreliefangle="90 Angle" thpad.airgapwidth=0.3 smdpad.connectstyle=Relief smdpad.reliefconductorwidth=1.6 smdpad.reliefentries=4 smdpad.polygonreliefangle="90 Angle" smdpad.airgapwidth=0.2 via.connectstyle=Direct via.reliefconductorwidth=0.254 via.reliefentries=4 via.polygonreliefangle="90 Angle" via.airgapwidth=0.254 // Правила подключения полигонов для падов от 2,7мм и меньше
PolygonConnect poly_connect_to_pad<=3 [(AsMM(PadXSize_AllLayers)<=3.01)or(AsMM(PadYSize_AllLayers)<=3.01)] p14: thpad.connectstyle=Relief thpad.reliefconductorwidth=1.6 thpad.reliefentries=4 thpad.polygonreliefangle="90 Angle" thpad.airgapwidth=0.3 smdpad.connectstyle=Relief smdpad.reliefconductorwidth=1.8 smdpad.reliefentries=4 smdpad.polygonreliefangle="90 Angle" smdpad.airgapwidth=0.2 via.connectstyle=Direct via.reliefconductorwidth=0.254 via.reliefentries=4 via.polygonreliefangle="90 Angle" via.airgapwidth=0.254 // Правила подключения полигонов для падов от 3мм и меньше
PolygonConnect poly_connect_to_pad<=7 [(AsMM(PadXSize_AllLayers)<7.01)or(AsMM(PadYSize_AllLayers)<=7.01)] p15: thpad.connectstyle=Relief thpad.reliefconductorwidth=2 thpad.reliefentries=4 thpad.polygonreliefangle="90 Angle" thpad.airgapwidth=0.4 smdpad.connectstyle=Relief smdpad.reliefconductorwidth=2 smdpad.reliefentries=4 smdpad.polygonreliefangle="90 Angle" smdpad.airgapwidth=0.3 via.connectstyle=Direct via.reliefconductorwidth=0.254 via.reliefentries=4 via.polygonreliefangle="90 Angle" via.airgapwidth=0.254 // Правила подключения полигонов для падов от 7мм и меньше
PolygonConnect poly_connect_to_pad [All] p16: thpad.connectstyle=Relief thpad.reliefconductorwidth=0.25 thpad.reliefentries=4 thpad.polygonreliefangle="90 Angle" thpad.airgapwidth=0.2 smdpad.connectstyle=Relief smdpad.reliefconductorwidth=0.25 smdpad.reliefentries=4 smdpad.polygonreliefangle="90 Angle" smdpad.airgapwidth=0.2 via.connectstyle=Direct via.reliefconductorwidth=0.25 via.reliefentries=4 via.polygonreliefangle="90 Angle" via.airgapwidth=0.2 // Правила подключения полигонов общие
RoutingCorners [All] p1 off: cornerstyle=45-Degree minsetback=2.5 maxsetback=2.5
RoutingVias [All] p1: holewidth=0.3 width=0.6 viastyle="Through Hole" minholewidth=0.3 minwidth=0.6 maxholewidth=5.9 maxwidth=6.4
SilkToSilkClearance silk_to_silk_clearance_std [All] p1 off: silktosilkclearance=0.15 // Отступ текста шелкографии от других примитивов шелкографии
SilkToSolderMaskClearance silk_to_solder_mask_clearance_std [IsPad] p1 off: minsilkscreentomaskgap=0.15 clearancetoexposedcopper=FALSE // Минимальное расстояние между элементами шелкографии и вскрытой медью
SolderMaskExpansion solder_mask_expansion_std [All] p1: expansion=0.05 istentingtop=FALSE // Припуск паяльной масски
SupplyNets "Schematic Supply Nets_7" [InNet('+3S')] p1: voltage=0.000
SupplyNets "Schematic Supply Nets_6" [InNet('CM5_1,8В')] p2: voltage=0.000
SupplyNets "Schematic Supply Nets_5" [InNet('GND')] p3: voltage=0.000
SupplyNets "Schematic Supply Nets_4" [InNet('CM5_3,3В')] p4: voltage=0.000
SupplyNets "Schematic Supply Nets_3" [InNet('VBUS_TYPEC')] p5: voltage=0.000
SupplyNets "Schematic Supply Nets_2" [InNet('+3,3В')] p6: voltage=0.000
SupplyNets "Schematic Supply Nets_1" [InNet('+5В')] p7: voltage=0.000
SupplyNets "Schematic Supply Nets" [InNet('+7,2В')] p8: voltage=0.000
UnRoutedNet [All] p1: checkbadconnections=TRUE
Width width_18um_std [All] p1: maxlimit=10 minlimit=0.125 preferedwidth=0.15 checkconnectedcopper=TRUE // Ширина проводников (общая)
19 further rules are at their usual default settings.

## Classes and differential pairs
differential pair class TypeC: TYPEC_D_2 TYPEC_RX_2 TYPEC_TX_2
net class TypeC: TYPEC_D_2_N TYPEC_D_2_P TYPEC_RX_2_N TYPEC_RX_2_P TYPEC_TX_2_N TYPEC_TX_2_P
polygon class GND: 5V_INNER BOT_GND BOT_REF_GND TOP_GND TOP_REF_GND
net class USB_2.0: USB2.0.USB_D_N USB2.0.USB_D_P
net class USB_2.0_CAM: USB2.0_CAM.USB_D_N USB2.0_CAM.USB_D_P
net class CAM_1: CAMERA_1.RX_CLK0_N CAMERA_1.RX_CLK0_P CAMERA_1.RX_D0_N CAMERA_1.RX_D0_P CAMERA_1.RX_D1_N CAMERA_1.RX_D1_P
net class CAM_0: CAMERA_0.RX_CLK0_N CAMERA_0.RX_CLK0_P CAMERA_0.RX_D0_N CAMERA_0.RX_D0_P CAMERA_0.RX_D1_N CAMERA_0.RX_D1_P
differential pair class USB_2.0: USB2.0.USB_D
differential pair class USB_2.0_CAM: USB2.0_CAM.USB_D
differential pair class CAM_1: CAMERA_1.RX_CLK0 CAMERA_1.RX_D0 CAMERA_1.RX_D1 CAMERA_1.RX_D2 CAMERA_1.RX_D3
differential pair class CAM_0: CAMERA_0.RX_CLK0 CAMERA_0.RX_D0 CAMERA_0.RX_D1 CAMERA_0.RX_D2 CAMERA_0.RX_D3
component class U_MB_USB: DD2 R9 R10 R11 TP11 TP12 TP13 TP14 X1 X2 X3 X4 С1 С2 С3 С4
component class U_MB_rpi_sys: R1 R2 R3 R4 R5 R6 R7 R8 SW1 TP1 TP2 TP3 TP4 TP5 TP6 TP7 TP8 TP9 TP10 VT1
component class U_MB_pwr: DD1 DD4 DD5 DD6 DD7 L1 L2 R23 R24 R25 R26 R27 R28 R29 R30 R31 R32 R33 R34 R35 R36 R37 R38 R39 SW4 SW5 SW6 SW7 SW8 TP16 TP17 TP18 TP19 TP20 TP21 VD3 VD4 VD5 VD6 VD7 VD8 X6 X7 С14 С15 С17 С18 С19 С20 С21 С22 С23 С24 С25 С26 С27 С28 С29 С30 С31 С32 С33 С34 С35 С36 С37 С38 С39
component class U_MB_peripherial: DD10 HL1 HL2 HL3 HL4 HL5 HL6 HL7 HL8 HL9 HL10 HL11 HL12 HL13 HL14 HL15 HL16 HL17 HL18 HL19 HL20 HL21 HL22 HL23 HL24 HL25 HL26 HL27 HL28 HL29 HL30 HL31 HL32 HL33 HL34 HL35 HL36 HL? R64 R65 R66 R67 R68 R69 R70 R71 R72 R73 R74 R75 R76 R77 R78 SW10 SW11 SW12 SW13 SW14 SW15 TP28 TP29 VD9 VD10 VD11 VD12 VD13 VD14 X14 X15 X16 С50 С51 С52 С53 С54 С55 С56 С57 С58 С59 С60 С61 С62 С63 С64 С65 С66 С67 С68 С69 С70 С71 С72 С73 С74 С75 С76 С77 С78 С79 С80 С81 С82 С83 С84 С85 С86 С87 С88
component class U_MB_mcu: DD3 R12 R13 R14 R15 R16 R17 R18 R19 R20 R21 R22 SW2 SW3 TP15 VD1 VD2 X5 XT1 С5 С6 С7 С8 С9 С10 С11 С12 С13
component class U_MB_drivers: DD8 DD9 R44 R45 R46 R47 R48 R49 R50 R51 R52 R53 R54 R55 R56 R57 R58 R59 R60 R61 R62 R63 TP24 TP25 TP26 TP27 С40 С41 С42 С43 С44 С45 С46 С47 С48 С49
component class U_MB_commutation: R40 R41 R42 R43 SW9 TP22 TP23 X8 X9 X10 X11 X12 X13
differential pair USB2.0_D_2: +USB2.0_D_2_P -USB2.0_D_2_N
differential pair TYPEC_TX_2: +TYPEC_TX_2_P -TYPEC_TX_2_N
differential pair TYPEC_RX_2: +TYPEC_RX_2_P -TYPEC_RX_2_N
differential pair TYPEC_D_2: +TYPEC_D_2_P -TYPEC_D_2_N
differential pair USB2.0.USB_D: +USB2.0.USB_D_P -USB2.0.USB_D_N
differential pair USB2.0_CAM.USB_D: +USB2.0_CAM.USB_D_P -USB2.0_CAM.USB_D_N
differential pair CAMERA_1.RX_D1: +CAMERA_1.RX_D1_P -CAMERA_1.RX_D1_N
differential pair CAMERA_1.RX_D0: +CAMERA_1.RX_D0_P -CAMERA_1.RX_D0_N
differential pair CAMERA_1.RX_CLK0: +CAMERA_1.RX_CLK0_P -CAMERA_1.RX_CLK0_N
differential pair CAMERA_0.RX_D1: +CAMERA_0.RX_D1_P -CAMERA_0.RX_D1_N
differential pair CAMERA_0.RX_D0: +CAMERA_0.RX_D0_P -CAMERA_0.RX_D0_N
differential pair CAMERA_0.RX_CLK0: +CAMERA_0.RX_CLK0_P -CAMERA_0.RX_CLK0_N

## Components (designator, comment, footprint, x,y, rotation, side; value= is the part's Value field where it differs from the comment)
DD1 "Raspberry Pi CM5" raspberry_pi_compute_module_4_header 25.509,56.25 r90 top locked
DD2 "AP22653W6" SOT23-6 40.125,9.55 r90 top
DD3 "STM32F412CGU6" UFQFPN48 28.7,123.175 r0 top
DD4 "LM1117-3.3" SOT-223 18.3,89.885 r180 top
DD5 "LMR14050QDPRRQ1" WSON-10 50.025,97.275 r90 top
DD6 "LMR14050QDPRRQ1" WSON-10 23.7,97.7 r90 top
DD7 "74LVC1G07GW" SOT353 4.65,106.75 r90 top
DD8 "MС33926" PQFN32 58.2,70.298 r180 top
DD9 "MС33926" PQFN32 58.2,56.298 r180 top
DD10 "MPU9250" QFN24-PAD 46.275,122.65 r270 top
HL1 "WS2812B" "ws2812b 4020" 52.955,130.1 r270 bottom
HL2 "WS2812B" "ws2812b 4020" 3.5,119.842 r0 bottom
HL3 "WS2812B" "ws2812b 4020" 3.5,63.458 r0 bottom
HL4 "WS2812B" "ws2812b 4020" 5.275,8.3 r40 bottom
HL5 "WS2812B" "ws2812b 4020" 46.955,130.1 r270 bottom
HL6 "WS2812B" "ws2812b 4020" 3.5,113.666 r0 bottom
HL7 "WS2812B" "ws2812b 4020" 3.5,57.182 r0 bottom
HL8 "WS2812B" "ws2812b 4020" 10.05,5.3 r70 bottom
HL9 "WS2812B" "ws2812b 4020" 40.955,130.1 r270 bottom
HL10 "WS2812B" "ws2812b 4020" 3.5,107.39 r0 bottom
HL11 "WS2812B" "ws2812b 4020" 3.5,50.906 r0 bottom
HL12 "WS2812B" "ws2812b 4020" 16.283,3.801 r83 bottom
HL13 "WS2812B" "ws2812b 4020" 34.955,130.1 r270 bottom
HL14 "WS2812B" "ws2812b 4020" 3.5,101.114 r0 bottom
HL15 "WS2812B" "ws2812b 4020" 3.5,44.63 r0 bottom
HL16 "WS2812B" "ws2812b 4020" 22.955,3.5 r90 bottom
HL17 "WS2812B" "ws2812b 4020" 28.955,130.1 r270 bottom
HL18 "WS2812B" "ws2812b 4020" 3.5,94.838 r0 bottom
HL19 "WS2812B" "ws2812b 4020" 3.5,38.354 r0 bottom
HL20 "WS2812B" "ws2812b 4020" 28.955,3.5 r90 bottom
HL21 "WS2812B" "ws2812b 4020" 22.955,130.1 r270 bottom
HL22 "WS2812B" "ws2812b 4020" 3.5,88.562 r0 bottom
HL23 "WS2812B" "ws2812b 4020" 3.5,32.078 r0 bottom
HL24 "WS2812B" "ws2812b 4020" 34.955,3.5 r90 bottom
HL25 "WS2812B" "ws2812b 4020" 3.5,82.286 r0 bottom
HL26 "WS2812B" "ws2812b 4020" 3.5,25.802 r0 bottom
HL27 "WS2812B" "ws2812b 4020" 40.955,3.5 r90 bottom
HL28 "WS2812B" "ws2812b 4020" 16.283,129.799 r277 bottom
HL29 "WS2812B" "ws2812b 4020" 3.5,76.01 r0 bottom
HL30 "WS2812B" "ws2812b 4020" 3.5,19.526 r0 bottom
HL31 "WS2812B" "ws2812b 4020" 46.955,3.5 r90 bottom
HL32 "WS2812B" "ws2812b 4020" 10.05,128.3 r290 bottom
HL33 "WS2812B" "ws2812b 4020" 3.5,69.734 r0 bottom
HL34 "WS2812B" "ws2812b 4020" 3.5,13.35 r0 bottom
HL35 "WS2812B" "ws2812b 4020" 52.955,3.5 r90 bottom
HL36 "WS2812B" "ws2812b 4020" 5.275,125.3 r320 bottom
L1 "22мкГн" SRP1038A 43.4,108.2 r270 top
L2 "22мкГн" SRP1038A 33.025,108.2 r270 top
R1 "100" R0402 27.025,94.475 r270 bottom
R2 "100" R0402 25.85,94.475 r270 bottom
R3 "10к" R0402 13.75,53.05 r0 top
R4 "10к" R0402 13.25,58.225 r0 top
R5 "10к" R0402 47.25,12.486 r270 top
R6 "10к" R0402 18.475,123.05 r90 top
R7 "2.2к" R0402 13.25,57.025 r180 top
R8 "2.2к" R0402 13.25,55.825 r180 top
R9 "5,1к" R0402 35.575,18.8 r0 top
R10 "5,1к" R0402 43.6,19 r180 top
R11 "15к" R0402 40.625,12.325 r180 top
R12 "100" R0402x4 18.15,120.175 r270 top
R13 "100" R0402x4 22.525,118.4 r0 top
R14 "100" R0402x4 25.65,117.252 r0 top
R15 "100" R0402x4 34.55,122.025 r90 top
R16 "10к" R0402 13.475,127.825 r270 top
R17 "100" R0402 34.15,124.7 r180 top
R18 "100" R0402 34.4,128.85 r90 top
R19 "100" R0402x4 30.35,129.1 r180 top
R20 "100" R0402x4 34.55,119.625 r90 top
R21 "100" R0402x4 28.05,117.25 r0 top
R22 "360" R0402 2.275,122.625 r180 top
R23 "15к" R0402 53.8,95.3 r180 top
R24 "15к" R0402 27.265,96.225 r270 top
R25 "560" R0402 2.275,119.725 r180 top
R26 "560" R0402 2.275,117 r180 top
R27 "73,2к" R0402 56.1,97.297 r90 top
R28 "10к" R0402 53.8,96.847 r0 top
R29 "56к" R0402 28.8,96.225 r270 top
R30 "10к" R0402 27.7,97.925 r0 top
R31 "1к" R0402 3.975,115.35 r0 top
R32 "100" R0402 5.6,43.275 r270 top
R33 "1,8к" R0402 2.125,43.275 r270 top
R34 "1,8к" R0402 3.283,43.275 r270 top
R35 "100" R0402 9.75,41.025 r270 top
R36 "100" R0402 4.442,43.275 r270 top
R37 "100" R0402 13.25,59.85 r0 top
R38 "100" R0402 14.5,48.5 r270 top
R39 "1к" R0402 5.3,109.2 r90 top
R40 "2,2к" R0402 73.975,31.95 r180 bottom
R41 "100" R0402x4 86.95,40.15 r90 top
R42 "100" R0402 59.9,99.675 r180 top
R43 "10к" R0402 13.25,54.75 r0 top
R44 "47к" R0402 55.1,70.3 r180 bottom
R45 "47к" R0402 55.1,56.3 r180 bottom
R46 "47к" R0402 61.6,73.1 r0 bottom
R47 "47к" R0402 61.6,59.2 r0 bottom
R48 "100" R0402 65.4,66.2 r180 bottom
R49 "100" R0402 65.4,67.3 r180 bottom
R50 "10к" R0402 54.5,76.3 r0 bottom
R51 "100" R0402 65.7,52.5 r180 bottom
R52 "100" R0402 65.7,53.6 r180 bottom
R53 "10к" R0402 54.5,62.3 r0 bottom
R54 "10к" R0402 54.5,75.1 r0 bottom
R55 "10к" R0402 61.9,68.7 r0 bottom
R56 "10к" R0402 54.5,61.1 r0 bottom
R57 "10к" R0402 61.9,54.7 r0 bottom
R58 "47к" R0402 61.6,71.9 r0 bottom
R59 "47к" R0402 61.6,57.9 r0 bottom
R60 "47к" R0402 65.4,68.4 r0 bottom
R61 "47к" R0402 65.7,54.7 r0 bottom
R62 "47к" R0402 65.4,65.1 r0 bottom
R63 "47к" R0402 65.7,51.4 r0 bottom
R64 "10к" R0402 42.575,124.7 r90 top
R65 "10к" R0402 41.3,124.7 r270 top
R66 "10к" R0402 50.25,122.4 r180 top
R67 "100" R0402 50.25,123.525 r180 top
R68 "100" R0402 50.25,124.65 r180 top
R69 "10к" R0402 50.25,125.775 r180 top
R70 "10к" R0402 50.25,126.9 r180 top
R71 "100" R0402 53.3,125.56 r270 top
R72 "100" R0402 53.2,122.52 r0 top
R73 "10к" R0402 53.2,119.98 r0 top
R74 "10к" R0402 55.775,127.05 r0 top
R75 "1к" R0402 54.95,132.225 r0 top
R76 "1к" R0402 15.055,108.275 r0 top
R77 "1к" R0402 10.35,89.85 r0 top
R78 "1к" R0402 6.8,39.4 r0 top
SW1 "" KTD0621 52,7.375 r90 top
SW2 "" it-1187 10.275,120.725 r180 top
SW3 "" OMRON_B3U-1000P 11.725,125.275 r0 top
SW4 "" "PLD 1.27X2" 11.6,96.94 r0 top
SW5 "" "PLD 1.27X2" 22.425,85.65 r270 top
SW6 "" it-1187 10.275,113.875 r180 top
SW7 "" "PLD 1.27X2" 8.855,21.575 r90 top
SW8 "" "PLD 1.27X2" 8.83,24.125 r90 top
SW9 "" KTD0621 52,17.4 r270 top
SW10 "" "limit switch" 11.35,93.395 r180 bottom
SW11 "" "limit switch" 11.35,41.195 r180 bottom
SW12 "" it-1187 39.175,130.285 r0 top
SW13 "" it-1187 50.075,130.285 r0 top
SW14 "" OMRON_B3U-1000P 19.825,130.525 r0 top
SW15 "" "PLD 1.27X2" 12.9,108.275 r270 top
TP1 "TestPoint" "0.5 x 0,9_round" 17.575,85.075 r90 top
TP2 "TestPoint" "0.5 x 0,9_round" 16.1,85.075 r90 top
TP3 "TestPoint" "0.5 x 0,9_round" 39.075,87.125 r90 top
TP4 "TestPoint" "0.5 x 0,9_round" 37.3,87.125 r90 top
TP5 "TestPoint" "0.5 x 0,9_round" 8.525,16.45 r180 top
TP6 "TestPoint" "0.5 x 0,9_round" 8.525,14.675 r180 top
TP7 "TestPoint" "0.5 x 0,9_round" 10.483,16.45 r180 top
TP8 "TestPoint" "0.5 x 0,9_round" 10.483,14.675 r180 top
TP9 "TestPoint" "0.5 x 0,9_round" 12.442,16.45 r180 top
TP10 "TestPoint" "0.5 x 0,9_round" 12.442,14.675 r180 top
TP11 "TestPoint" "0.5 x 0,9_round" 42.975,8.2 r180 top
TP12 "TestPoint" "0.5 x 0,9_round" 37.65,12.675 r180 top
TP13 "TestPoint" "0.5 x 0,9_round" 20.3,22 r270 top
TP14 "TestPoint" "0.5 x 0,9_round" 20.3,15.9 r270 top
TP15 "TestPoint" "0.5 x 0,9_round" 16.8,108.85 r0 top
TP16 "TestPoint" "0.5 x 0,9_round" 14.4,12.8 r90 top
TP17 "TestPoint" "0.5 x 0,9_round" 12.3,89.85 r90 top
TP18 "TestPoint" "0.5 x 0,9_round" 21.8,105.95 r90 top
TP19 "TestPoint" "0.5 x 0,9_round" 51.325,103.25 r90 top
TP20 "TestPoint" "0.5 x 0,9_round" 14.4,14.675 r180 top
TP21 "TestPoint" "0.5 x 0,9_round" 14.4,16.45 r180 top
TP22 "TestPoint" "0.5 x 0,9_round" 9.65,102.837 r90 top
TP23 "TestPoint" "0.5 x 0,9_round" 9.325,85.075 r90 top
TP24 "TestPoint" "0.5 x 0,9_round" 13.625,102.075 r270 top
TP25 "TestPoint" "0.5 x 0,9_round" 11.95,102.075 r90 top
TP26 "TestPoint" "0.5 x 0,9_round" 13.625,103.6 r270 top
TP27 "TestPoint" "0.5 x 0,9_round" 11.95,103.6 r90 top
TP28 "TestPoint" "0.5 x 0,9_round" 23.175,131.85 r90 top
TP29 "TestPoint" "0.5 x 0,9_round" 24.525,131.85 r90 top
VD1 "*" SOD323 19.3,109.475 r270 top
VD2 "Красный светодиод" "0603 - led - no point" 4.55,122.625 r180 top
VD3 "Красный светодиод" "0603 - led" 4.55,119.725 r0 top
VD4 "Красный светодиод" "0603 - led" 4.55,116.825 r0 top
VD5 "" TO-277A 42.31,98.06 r0 top
VD6 "" TO-277A 34.115,98.035 r180 top
VD7 "Синий светодиод" "0603 - led - no point" 4.55,113.925 r180 top
VD8 "Красный светодиод" "0603 - led - no point" 4.55,111.025 r180 top
VD9 "Красный светодиод" "0603 - led" 12.375,106.45 r0 top
VD10 "Красный светодиод" "0603 - led" 16.325,130.575 r90 top
VD11 "Красный светодиод" "0603 - led" 54.775,129.085 r90 top
VD12 "Красный светодиод" "0603 - led" 43.875,129.085 r90 top
VD13 "Красный светодиод" "0603 - led" 15.675,26.2 r0 top
VD14 "Красный светодиод" "0603 - led - no point" 10.6,91.45 r180 top
VT1 "IRLML2502TRPBF" SOT23 16.9,124.785 r270 top
X1 "2047110001" 2047110001 39.33,18.8 r270 top
X2 "Jumper_3" solid_jumper_3 20.55,17.55 r180 top
X3 "Jumper_3" solid_jumper_3 20.55,20.375 r180 top
X4 "2047110001" 2047110001 29.655,18.8 r270 top
X5 "PLS 1 x 5" "PLS_1x5 - emty" 16.8,111.12 r180 top
X6 "MW-2M" DS1020-02-02MVT1R 16.65,95.625 r0 top
X7 "MW-2M" MW-2M 24.325,89.825 r180 top
X8 "PLS 1.0 1x15" "PLS_1x15 1.0 - without contour" 72,100.096 r90 top
X9 "PLS 1.0 1x15" "PLS_1x15 1.0 - without contour" 86,33.5 r270 top
X10 "PLD2-2x10" "PLS 2.00 10x2" 48.553,63.298 r270 top
X11 "PicoBlade-8" "PicoBlade-8 fallen" 90.25,40 r270 top
X12 "" "PLS 4 x 2" 54,104.5 r270 top
X13 "640456-7" JST-640456-7 73.61,46.595 r90 bottom
X14 "Jumper_3" solid_jumper_3 47.75,116.2 r0 bottom
X15 "Jumper_3" solid_jumper_3 47.75,118.8 r0 bottom
X16 "DS1021-1x4" "PLS_1x4 - emty" 55.525,125.06 r0 top
XT1 "16Мгц" KX-7 20.4,126.1 r0 top
С1 "10мк" C0603 36.9,8.2 r0 top
С2 "10мк" C0603 36.9,10.875 r0 top
С3 "220" C0402 26.145,17.7 r270 top
С4 "220" C0402 33.2,21 r270 top
С5 "0,1мк" C0402 14.955,121.675 r90 top
С6 "0,1мк" C0402 12.395,128.325 r270 top
С7 "22" C0402 24.145,128.9 r270 top
С8 "22" C0402 22.125,123.82 r0 top
С9 "2,2мк" C0402 30.93,117.6 r90 top
С10 "0,1мк" C0402 25.145,128.875 r270 top
С11 "0,1мк" C0402 23.025,122.425 r270 top
С12 "0,1мк" C0402 32.555,117.6 r90 top
С13 "0,1мк" C0402 33.075,127.58 r180 top
С14 "100мк" "C1210_AA - 2.5" 52.025,88.375 r90 top
С15 "100мк" "C1210_AA - 2.5" 34.1,88.375 r90 top
С17 "100мк" "C1210_AA - 2.5" 48.175,88.375 r90 top
С18 "100мк" "C1210_AA - 2.5" 30.475,88.375 r90 top
С19 "10мк" C0603 12.153,87.447 r0 top
С20 "0,1мк" C0402 46.945,96.3 r270 top
С21 "0,1мк" C0402 20.595,98.525 r270 top
С22 "470" C0402 53.3,98.42 r0 top
С23 "470" C0402 27.2,99.445 r0 top
С24 "100мк" "C1210_AA - 2.5" 50.95,108.6 r180 top
С25 "100мк" "C1210_AA - 2.5" 25.4,113.475 r0 top
С26 "100мк" "C1210_AA - 2.5" 50.95,111.875 r180 top
С27 "100мк" "C1210_AA - 2.5" 25.4,109.8 r0 top
С28 "0,1мк" C0402 50.69,106.1 r270 top
С29 "0,1мк" C0402 51.945,106.1 r270 top
С30 "0,1мк" C0402 4.038,49.89 r0 top
С31 "0,1мк" C0402 13.45,47.925 r270 top
С32 "0,1мк" C0402 4.038,51.04 r0 top
С33 "0,1мк" C0402 12.295,47.925 r270 top
С34 "0,1мк" C0402 4.038,52.19 r0 top
С35 "0,1мк" C0402 12.255,44.975 r90 top
С36 "0,1мк" C0402 13.4,44.975 r90 top
С37 "0,1мк" C0402 4.038,46.44 r0 top
С38 "0,1мк" C0402 4.038,47.59 r0 top
С39 "0,1мк" C0402 4.038,48.74 r0 top
С40 "100мк" "C1210_AA - 2.5" 67.75,61.25 r180 top
С41 "100мк" "C1210_AA - 2.5" 67.75,75.25 r180 top
С42 "100мк" "C1210_AA - 2.5" 67.75,57.95 r180 top
С43 "100мк" "C1210_AA - 2.5" 67.75,71.95 r180 top
С44 "0,033мк" C0402 60.827,64.514 r0 top
С45 "0,033мк" C0402 60.827,50.548 r0 top
С46 "100мк" "C1210_AA - 2.5" 67.75,54.65 r180 top
С47 "100мк" "C1210_AA - 2.5" 67.75,68.65 r180 top
С48 "100мк" "C1210_AA - 2.5" 67.75,51.35 r180 top
С49 "100мк" "C1210_AA - 2.5" 67.75,65.35 r180 top
С50 "0,1мк" C0402 41.575,121.745 r0 top
С51 "0,1мк" C0402 53.875,128.595 r180 bottom
С52 "0,1мк" C0402 5.005,120.762 r270 bottom
С53 "0,1мк" C0402 2.775,34.905 r0 bottom
С54 "0,1мк" C0402 5.817,10.128 r310 bottom
С55 "0,1мк" C0402 47.9,128.445 r180 bottom
С56 "0,1мк" C0402 5.005,114.586 r270 bottom
С57 "0,1мк" C0402 2.775,41.18 r0 bottom
С58 "0,1мк" C0402 9.875,7.125 r340 bottom
С59 "0,1мк" C0402 46.025,119.125 r180 top
С60 "0,01мк" C0402 46.025,117.58 r180 top
С61 "0,1мк" C0402 41.875,128.575 r180 bottom
С62 "0,1мк" C0402 5.005,108.31 r270 bottom
С63 "0,1мк" C0402 2.775,47.55 r0 bottom
С64 "0,1мк" C0402 15.725,5.425 r353 bottom
С65 "0,1мк" C0402 35.875,128.595 r180 bottom
С66 "0,1мк" C0402 5.005,102.034 r270 bottom
С67 "0,1мк" C0402 5.005,51.826 r270 bottom
С68 "0,1мк" C0402 22.035,5.005 r0 bottom
С69 "0,1мк" C0402 29.875,128.595 r180 bottom
С70 "0,1мк" C0402 2.775,97.705 r0 bottom
С71 "0,1мк" C0402 5.03,58.45 r270 bottom
С72 "0,1мк" C0402 28.035,5.005 r0 bottom
С73 "0,1мк" C0402 23.875,128.595 r180 bottom
С74 "0,1мк" C0402 2.775,91.455 r0 bottom
С75 "0,1мк" C0402 5.005,64.378 r270 bottom
С76 "0,1мк" C0402 34.035,5.005 r0 bottom
С77 "0,1мк" C0402 5.005,83.206 r270 bottom
С78 "0,1мк" C0402 5.005,26.722 r270 bottom
С79 "0,1мк" C0402 40.035,5.005 r0 bottom
С80 "0,1мк" C0402 17.5,128.375 r187 bottom
С81 "0,1мк" C0402 5.005,76.93 r270 bottom
С82 "0,1мк" C0402 5.005,20.446 r270 bottom
С83 "0,1мк" C0402 46.035,5.005 r0 bottom
С84 "0,1мк" C0402 12.514,129.958 r290 bottom
С85 "0,1мк" C0402 5.005,70.654 r270 bottom
С86 "0,1мк" C0402 5.005,14.27 r270 bottom
С87 "0,1мк" C0402 52.035,5.005 r0 bottom
С88 "0,1мк" C0402 7.11,125.013 r230 bottom

## Footprints (in the part's own frame and the unit in brackets; to place one, negate y for a bottom-side part, rotate by r counter-clockwise, add the part's x,y. Pads: shape width x height; smd on the part's side, far side on the other; paste and mask are expansions set on the pad)
"0.5 x 0,9_round" [mm]
  round 0.9 hole 0.5: 1(0,0)
"0603 - led" [mm]
  rect 0.7x1 smd: 1(-0.75,0) 2(0.75,0)
  Top Layer pour cut-out: -0.4,0.5 0.4,0.5 0.4,-0.5 -0.4,-0.5
  silkscreen extent -1.33,-0.73 1.8,0.73, body extent -0.82,-0.37 0.82,0.36, height 0.68
"0603 - led - no point" [mm]
  rect 0.7x1 smd: 1(-0.75,0) 2(0.75,0)
  Top Layer pour cut-out: -0.4,0.5 0.4,0.5 0.4,-0.5 -0.4,-0.5
  silkscreen extent -1.33,-0.73 1.33,0.73, body extent -0.82,-0.37 0.82,0.36, height 0.68
2047110001 [mm] "USB Type-C 3.1"
  rect 0.3x0.95 smd: 1(-2.75,0.755) 2(-2.25,0.755) 3(-1.75,0.755) 4(-1.25,0.755) 5(-0.75,0.755) 6(-0.25,0.755) 7(0.25,0.755) 8(0.75,0.755) 9(1.25,0.755) 10(1.75,0.755) 11(2.25,0.755) 12(2.75,0.755) 13(-2.75,-0.755) 14(-2.25,-0.755) 15(-1.75,-0.755) 16(-1.25,-0.755) 17(-0.75,-0.755) 18(-0.25,-0.755) 19(0.25,-0.755) 20(0.75,-0.755) 21(1.25,-0.755) 22(1.75,-0.755) 23(2.25,-0.755) 24(2.75,-0.755)
  oval 1.7x0.9 hole 0.5 slot 1.2 at 0 deg: TP(-3.95,0) TP(3.95,0)
  oval 2x1.2 hole 0.6 slot 1.4 at 0 deg: TP(-3.45,2.15) TP(-3.45,-2.15) TP(3.45,2.15) TP(3.45,-2.15)
  silkscreen extent -4.52,-2.4 4.52,2.4, body extent -4.44,-2.15 4.5,2.45, height 9.05
C0402 [mm]
  rrect50% 0.5x0.6 smd: 1(0,-0.02) 2(1,-0.02)
  silkscreen extent -0.45,-0.53 1.45,0.48, body extent 0,-0.28 1,0.22, height 0.5
C0603 [mm]
  rrect50% 0.7x1 smd: 1(-0.75,0) 2(0.75,0)
  Top Layer pour cut-out: -0.4,0.5 0.4,0.5 0.4,-0.5 -0.4,-0.5
  silkscreen extent -1.33,-0.73 1.33,0.73, body extent -0.8,-0.4 0.8,0.4, height 0.9
"C1210_AA - 2.5" [mm]
  rrect50% 1.5x2.6 smd: 1(-1.2,0) 2(1.2,0)
  Top Layer pour cut-out: -0.45,1.3 0.45,1.3 0.45,-1.3 -0.45,-1.3
  silkscreen extent -2.2,-1.55 2.17,1.57, body extent -1.6,-1.25 1.6,1.25, height 2.5
DS1020-02-02MVT1R [mm]
  rect 2.2x2.5 smd: 0(-2.325,0) 0(2.325,0)
  rect 0.6x1.7 smd: 1(-0.625,2.5) 2(0.625,2.5)
  silkscreen extent -0.95,-1.4 0.95,-1.4
it-1187 [mm] "switch"
  rect 1.4x1.4 smd: 1(-2.9,1.95) 1(2.9,1.95) 2(-2.9,-1.95) 2(2.9,-1.95)
  silkscreen extent -2.6,-2.6 2.6,2.6, body extent -3.2,-2.6 3.2,2.6, height 1.5
JST-640456-7 [mm]
  round 1.7 hole 1.2: 1(3.18,1.27) 2(3.18,3.81) 3(3.18,6.35) 4(3.18,8.89) 5(3.18,11.43) 6(3.18,13.97) 7(3.18,16.51)
  silkscreen extent 0,0 5.72,17.78, body extent -0.06,0 5.78,17.78, height 10.03
KTD0621 [mm] "silicon tact switch"
  rect 2x2 smd: 1(-3,0) 2(3,0)
  silkscreen extent -3.3,-3.3 3.3,3.3, body extent -3.3,-3 3.3,3, height 5
KX-7 [mm]
  rect 1.3x1.1 smd: 1(0,0) 2(2.3,0) 3(2.3,1.8) 4(0,1.8)
  silkscreen extent -0.82,-0.72 3.13,2.53, body extent -0.46,-0.35 2.76,2.15, height 0.81
"limit switch" [mil]
  round 60 hole 30: 1(-200,0) 2(0,0) 3(200,0)
  silkscreen extent -257,-173 257,173, body extent -254,-169 254,169, height 525
MW-2M [mm]
  round 1.2 hole 0.7: 1(0,-1)
  rect 1.2x1.2 hole 0.7: 2(0,1)
  silkscreen extent -2.7,-3 1.8,3, body extent -2.7,-2.95 1.8,2.95, height 6
OMRON_B3U-1000P [mm]
  rrect50% 0.8x1.7 smd: 1(-1.75,0) 2(1.75,0)
  round 0 hole 0.75 unplated: ""(0,0)
  silkscreen extent -1.5,-1.25 1.5,1.22, body extent -2,-1.25 2,1.25, height 1.6
"PicoBlade-8 fallen" [mm]
  rect 1x2.5 smd: 1(4.375,0) 2(3.125,0) 3(1.875,0) 4(0.625,0) 5(-0.625,0) 6(-1.875,0) 7(-3.125,0) 8(-4.375,0)
  silkscreen extent -5.2,-1.6 5.25,1.1, body extent -5.87,-0.92 5.87,5.58, height 1.33
"PLD 1.27X2" [mm]
  rect 1.12x1.12 hole 0.7: 1(0,0)
  round 1.12 hole 0.7: 2(0,-1.27)
  silkscreen extent -0.95,-2.15 0.95,0.9
"PLS 2.00 10x2" [mm] "сквозной PLS 2.00 10x2"
  round 1.7 hole 1: 1(-9,1) 2(-9,-1) 3(-7,1) 4(-7,-1) 5(-5,1) 6(-5,-1) 7(-3,1) 8(-3,-1) 9(-1,1) 10(-1,-1) 11(1,1) 12(1,-1) 13(3,1) 14(3,-1) 15(5,1) 16(5,-1) 17(7,1) 18(7,-1) 19(9,1) 20(9,-1)
"PLS 4 x 2" [mm] "2.54"
  round 1.9 hole 1: 1(0,0) 2(2.54,0) 3(0,2.54) 4(2.54,2.54) 5(0,5.08) 6(2.54,5.08) 7(0,7.62) 8(2.54,7.62)
  silkscreen extent -1.27,-1.92 3.81,8.89
"PLS_1x4 - emty" [mm]
  round 1.9 hole 1: 1(0,0) 2(0,-2.54) 3(0,-5.08)
  rect 1.9x1.9 hole 1: 4(0,-7.62)
"PLS_1x5 - emty" [mm]
  rect 1.9x1.9 hole 1: 1(0,0)
  round 1.9 hole 1: 2(0,-2.54) 3(0,-5.08) 4(0,-7.62) 5(0,-10.16)
"PLS_1x15 1.0 - without contour" [mm]
  rect 0.85x0.85 hole 0.5: 1(0,0)
  round 0.85 hole 0.5: 2(0,-1) 3(0,-2) 4(0,-3) 5(0,-4) 6(0,-5) 7(0,-6) 8(0,-7) 9(0,-8) 10(0,-9) 11(0,-10) 12(0,-11) 13(0,-12) 14(0,-13) 15(0,-14)
  silkscreen extent -0.7,-14.7 0.7,0.7
PQFN32 [mm]
  rect 1.4x1.4 smd mask+0: 1(-3.6,3.6) 9(-3.6,-3.6) 17(3.6,-3.6) 25(3.6,3.6)
  rect 1.4x0.6 smd mask+0: 2(-3.6,2.4) 3(-3.6,1.6) 4(-3.6,0.8) 5(-3.6,0) 6(-3.6,-0.8) 7(-3.6,-1.6) 8(-3.6,-2.4) 18(3.6,-2.4) 19(3.6,-1.6) 20(3.6,-0.8) 21(3.6,0) 22(3.6,0.8) 23(3.6,1.6) 24(3.6,2.4)
  rect 0.6x1.4 smd mask+0: 10(-2.4,-3.6) 11(-1.6,-3.6) 12(-0.8,-3.6) 13(0,-3.6) 14(0.8,-3.6) 15(1.6,-3.6) 16(2.4,-3.6) 26(2.4,3.6) 27(1.6,3.6) 28(0.8,3.6) 29(0,3.6) 30(-0.8,3.6) 31(-1.6,3.6) 32(-2.4,3.6)
  rect 5x5.2 smd mask+0: 33(0,0)
  silkscreen extent -5.25,-4.5 4.5,4.5, body extent -4,-4 4,4, height 2.1
QFN24-PAD [mm] "QFN 24Pin"
  rect 0.8x0.3 smd: 1(-2,1.25) 2(-2,0.75) 3(-2,0.25) 4(-2,-0.25) 5(-2,-0.75) 6(-2,-1.25) 13(2,-1.25) 14(2,-0.75) 15(2,-0.25) 16(2,0.25) 17(2,0.75) 18(2,1.25)
  rect 1.5x1.5 smd: 2(0,0)
  rect 0.3x0.8 smd: 7(-1.25,-2) 8(-0.75,-2) 9(-0.25,-2) 10(0.25,-2) 11(0.75,-2) 12(1.25,-2) 19(1.25,2) 20(0.75,2) 21(0.25,2) 22(-0.25,2) 23(-0.75,2) 24(-1.25,2)
  silkscreen extent -2.32,-2.32 2.32,2.32, body extent -2,-2 2,2, height 0.75
R0402 [mm]
  rect 0.5x0.6 smd: 1(-0.5,0) 2(0.5,0)
  silkscreen extent -0.95,-0.5 0.95,0.5, body extent -0.5,-0.23 0.5,0.28, height 0.36
R0402x4 [mm]
  rrect50% 0.25x0.4 smd: 1(0.4,0.398) 2(0.4,1.4) 3(0.9,0.398) 4(0.9,1.4) 5(1.4,0.398) 6(1.4,1.4) 7(1.9,0.398) 8(1.9,1.4)
  silkscreen extent 0.12,0.8 2.17,1, body extent 0.15,0.4 2.15,1.4, height 0.35
raspberry_pi_compute_module_4_header [mil]
  rect 9x28 smd paste+0: 1(283.17,730.65) 2(283.17,609.39) 3(267.42,730.65) 4(267.42,609.39) 5(251.67,730.65) 6(251.67,609.39) 7(235.92,730.65) 8(235.92,609.39) 9(220.17,730.65) 10(220.17,609.39) 11(204.43,730.65) 12(204.43,609.39) 13(188.68,730.65) 14(188.68,609.39) 15(172.93,730.65) 16(172.93,609.39) 17(157.18,730.65) 18(157.18,609.39) 19(141.43,730.65) 20(141.43,609.39) 21(125.69,730.65) 22(125.69,609.39) 23(109.94,730.65) 24(109.94,609.39) 25(94.19,730.65) 26(94.19,609.39) 27(78.44,730.65) 28(78.44,609.39) 29(62.69,730.65) 30(62.69,609.39) 31(46.95,730.65) 32(46.95,609.39) 33(31.2,730.65) 34(31.2,609.39) 35(15.45,730.65) 36(15.45,609.39) 37(-0.3,730.65) 38(-0.3,609.39) 39(-16.05,730.65) 40(-16.05,609.39) 41(-31.79,730.65) 42(-31.79,609.39) 43(-47.54,730.65) 44(-47.54,609.39) 45(-63.29,730.65) 46(-63.29,609.39) 47(-79.04,730.65) 48(-79.04,609.39) 49(-94.79,730.65) 50(-94.79,609.39) 51(-110.53,730.65) 52(-110.53,609.39) 53(-126.28,730.65) 54(-126.28,609.39) 55(-142.03,730.65) 56(-142.03,609.39) 57(-157.78,730.65) 58(-157.78,609.39) 59(-173.53,730.65) 60(-173.53,609.39) 61(-189.27,730.65) 62(-189.27,609.39) 63(-205.02,730.65) 64(-205.02,609.39) 65(-220.77,730.65) 66(-220.77,609.39) 67(-236.52,730.65) 68(-236.52,609.39) 69(-252.27,730.65) 70(-252.27,609.39) 71(-268.01,730.65) 72(-268.01,609.39) 73(-283.76,730.65) 74(-283.76,609.39) 75(-299.51,730.65) 76(-299.51,609.39) 77(-315.26,730.65) 78(-315.26,609.39) 79(-331.01,730.65) 80(-331.01,609.39) 81(-346.75,730.65) 82(-346.75,609.39) 83(-362.5,730.65) 84(-362.5,609.39) 85(-378.25,730.65) 86(-378.25,609.39) 87(-394,730.65) 88(-394,609.39) 89(-409.75,730.65) 90(-409.75,609.39) 91(-425.49,730.65) 92(-425.49,609.39) 93(-441.24,730.65) 94(-441.24,609.39) 95(-456.99,730.65) 96(-456.99,609.39) 97(-472.74,730.65) 98(-472.74,609.39) 99(-488.49,730.65) 100(-488.49,609.39) 101(283.17,-609.39) 102(283.17,-730.65) 103(267.42,-609.39) 104(267.42,-730.65) 105(251.67,-609.39) 106(251.67,-730.65) 107(235.92,-609.39) 108(235.92,-730.65) 109(220.17,-609.39) 110(220.17,-730.65) 111(204.43,-609.39) 112(204.43,-730.65) 113(188.68,-609.39) 114(188.68,-730.65) 115(172.93,-609.39) 116(172.93,-730.65) 117(157.18,-609.39) 118(157.18,-730.65) 119(141.43,-609.39) 120(141.43,-730.65) 121(125.69,-609.39) 122(125.69,-730.65) 123(109.94,-609.39) 124(109.94,-730.65) 125(94.19,-609.39) 126(94.19,-730.65) 127(78.44,-609.39) 128(78.44,-730.65) 129(62.69,-609.39) 130(62.69,-730.65) 131(46.95,-609.39) 132(46.95,-730.65) 133(31.2,-609.39) 134(31.2,-730.65) 135(15.45,-609.39) 136(15.45,-730.65) 137(-0.3,-609.39) 138(-0.3,-730.65) 139(-16.05,-609.39) 140(-16.05,-730.65) 141(-31.79,-609.39) 142(-31.79,-730.65) 143(-47.54,-609.39) 144(-47.54,-730.65) 145(-63.29,-609.39) 146(-63.29,-730.65) 147(-79.04,-609.39) 148(-79.04,-730.65) 149(-94.79,-609.39) 150(-94.79,-730.65) 151(-110.53,-609.39) 152(-110.53,-730.65) 153(-126.28,-609.39) 154(-126.28,-730.65) 155(-142.03,-609.39) 156(-142.03,-730.65) 157(-157.78,-609.39) 158(-157.78,-730.65) 159(-173.53,-609.39) 160(-173.53,-730.65) 161(-189.27,-609.39) 162(-189.27,-730.65) 163(-205.02,-609.39) 164(-205.02,-730.65) 165(-220.77,-609.39) 166(-220.77,-730.65) 167(-236.52,-609.39) 168(-236.52,-730.65) 169(-252.27,-609.39) 170(-252.27,-730.65) 171(-268.01,-609.39) 172(-268.01,-730.65) 173(-283.76,-609.39) 174(-283.76,-730.65) 175(-299.51,-609.39) 176(-299.51,-730.65) 177(-315.26,-609.39) 178(-315.26,-730.65) 179(-331.01,-609.39) 180(-331.01,-730.65) 181(-346.75,-609.39) 182(-346.75,-730.65) 183(-362.5,-609.39) 184(-362.5,-730.65) 185(-378.25,-609.39) 186(-378.25,-730.65) 187(-394,-609.39) 188(-394,-730.65) 189(-409.75,-609.39) 190(-409.75,-730.65) 191(-425.49,-609.39) 192(-425.49,-730.65) 193(-441.24,-609.39) 194(-441.24,-730.65) 195(-456.99,-609.39) 196(-456.99,-730.65) 197(-472.74,-609.39) 198(-472.74,-730.65) 199(-488.49,-609.39) 200(-488.49,-730.65)
  round 267.72 hole 165.35: ""(-944.88,-649.25) ""(-944.88,649.25) ""(944.88,649.25)
  silkscreen extent -1100,-804 1100,804, body extent -1083,-787 1083,787, height 205
SOD323 [mm]
  rect 0.6x0.8 smd: 1(-1.6,0) 2(0.75,0)
  silkscreen extent -2,-0.6 0.9,0.87, body extent -1.68,-0.68 0.82,0.67, height 1
solid_jumper_3 [mm]
  rect 1x1.5 smd mask+0.1: 1(-1.5,0)
  rect 0.25x1.5 smd: 2(0.25,0)
  rect 0.45x1.5 smd: 3(1.75,0)
  Top Layer region: -0.5,0.75 0.375,0.75 1.1,0 0.375,-0.75 -0.5,-0.75 0.1,0
  Top Layer region: -2,0.75 -1,0.75 -0.375,0 -1,-0.75 -2,-0.75
  Top Layer region: 2,0.75 0.875,0.75 1.525,0 0.875,-0.75 2,-0.75
  silkscreen extent -2.25,-1 2.25,1
SOT23 [mm] "mosfet"
  rect 0.95x0.65 smd: 1(-1.235,0.95) 2(-1.235,-0.95) 3(1.235,0)
  silkscreen extent -0.34,-1.5 0.76,1.5, body extent -1.25,-1.5 1.25,1.5, height 1.05